# EAGLE board matrix_io_panel (EAGLE 9.5.2), part 1 of 3
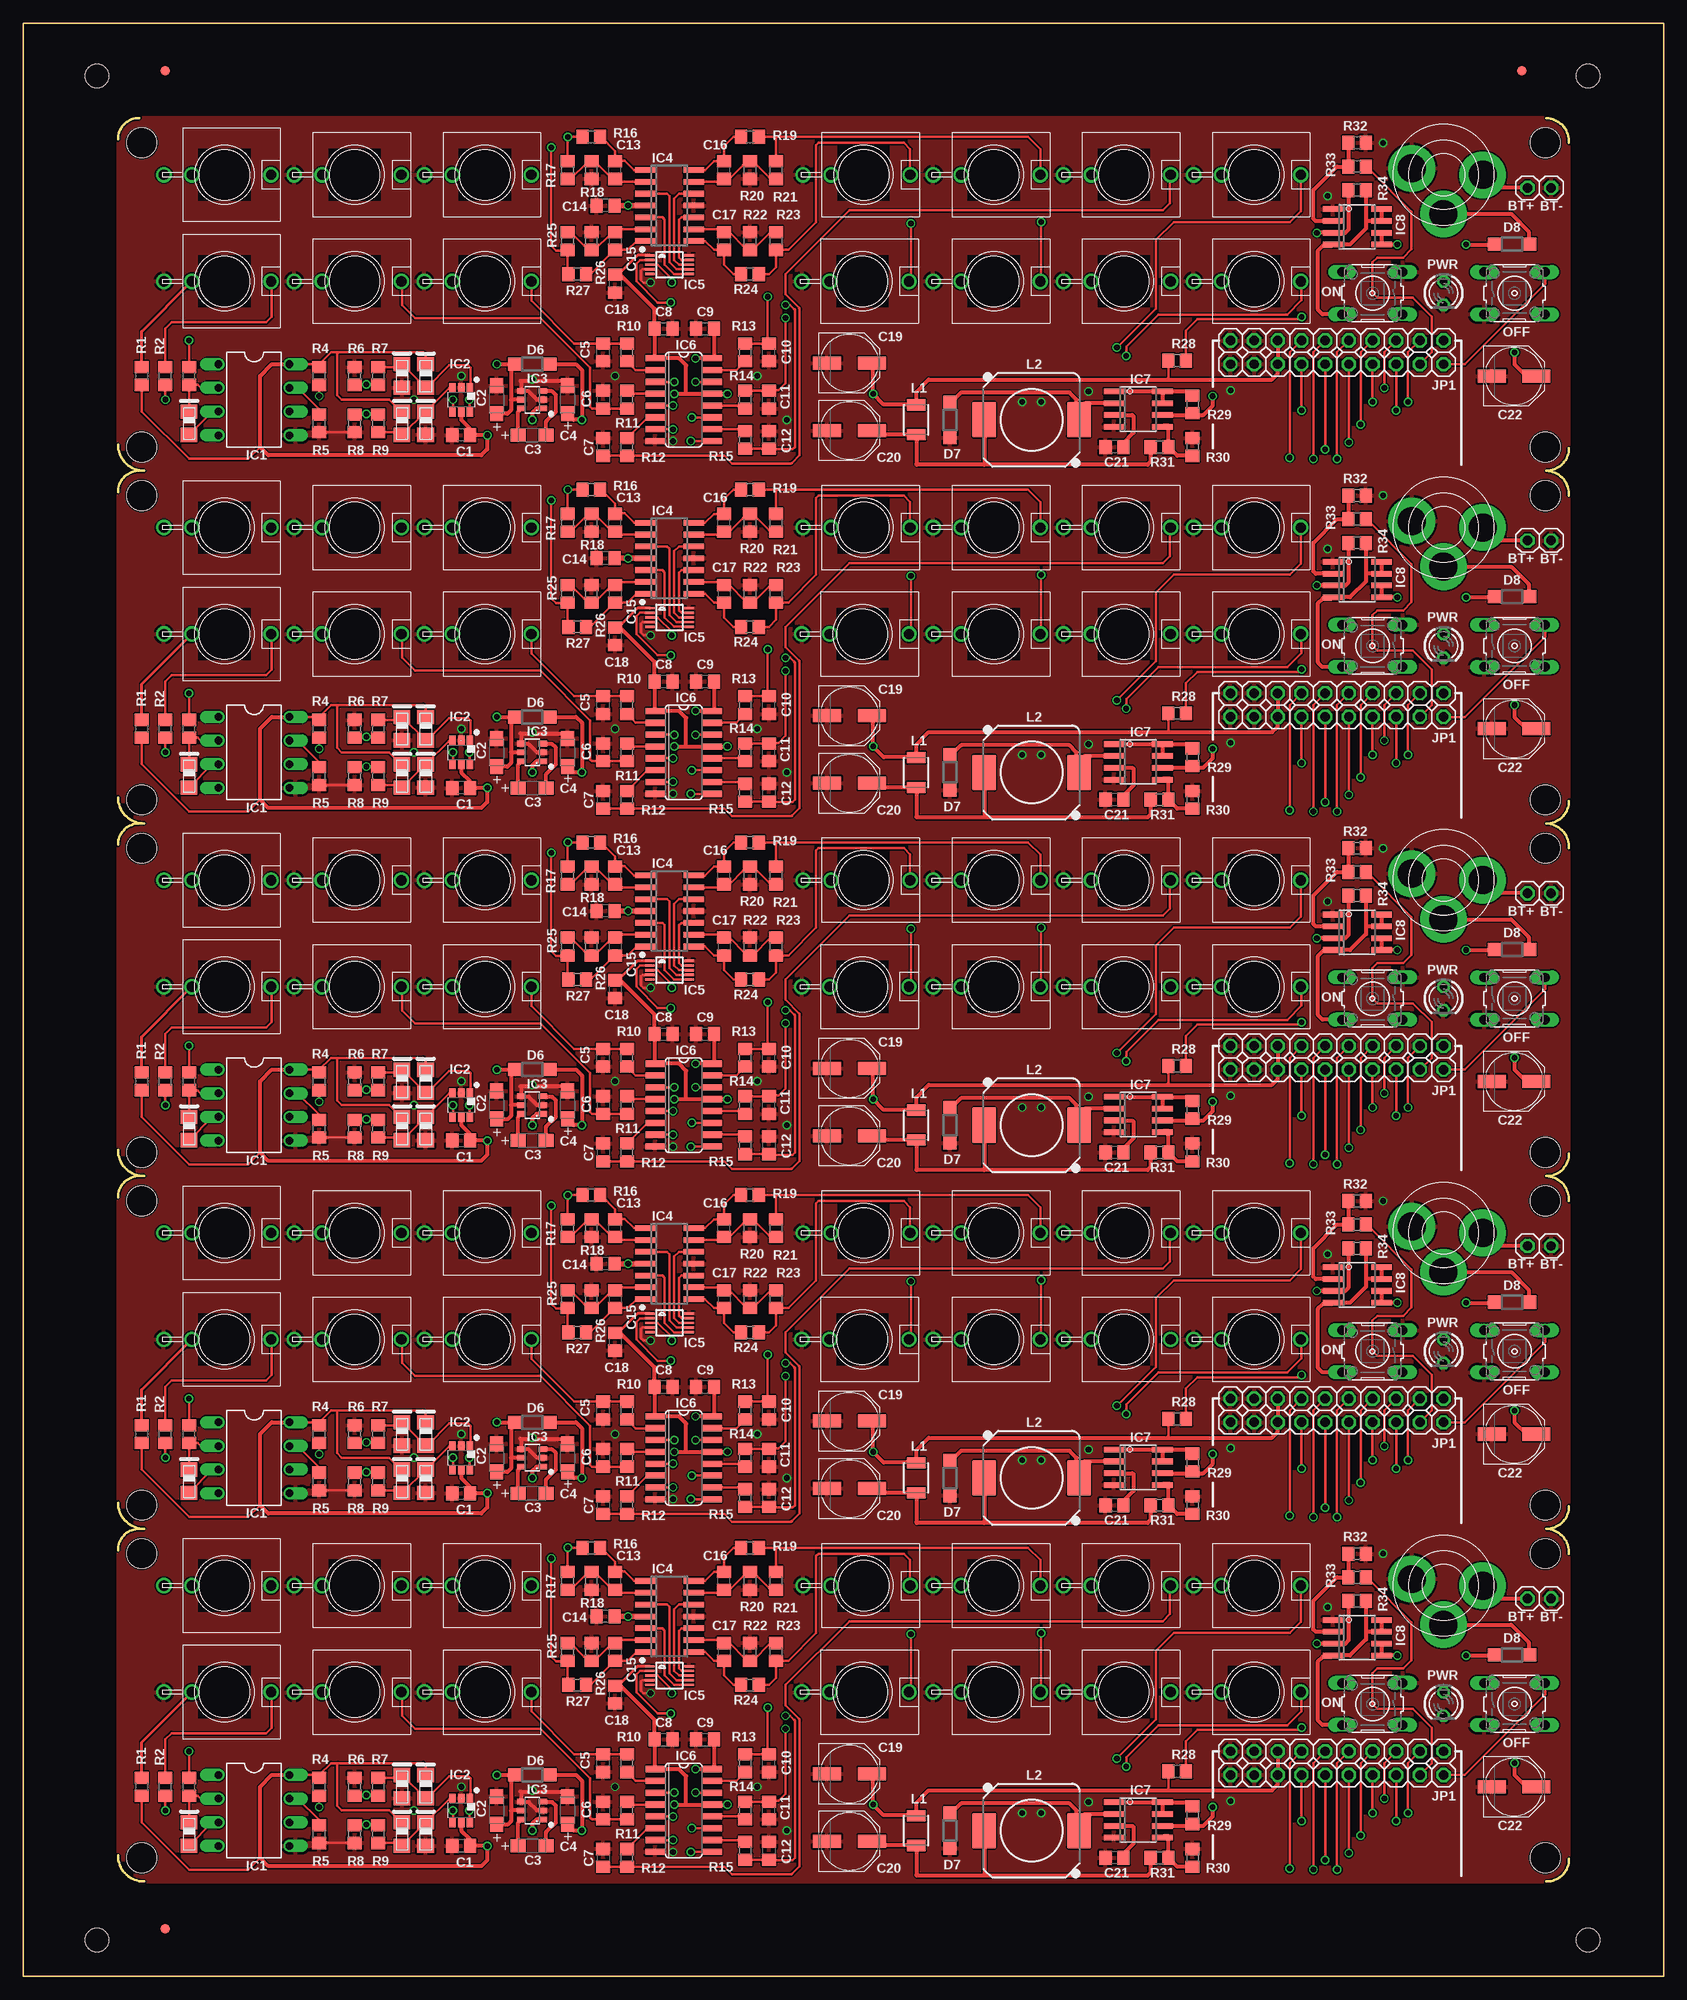
[diagram p0: board, top side]
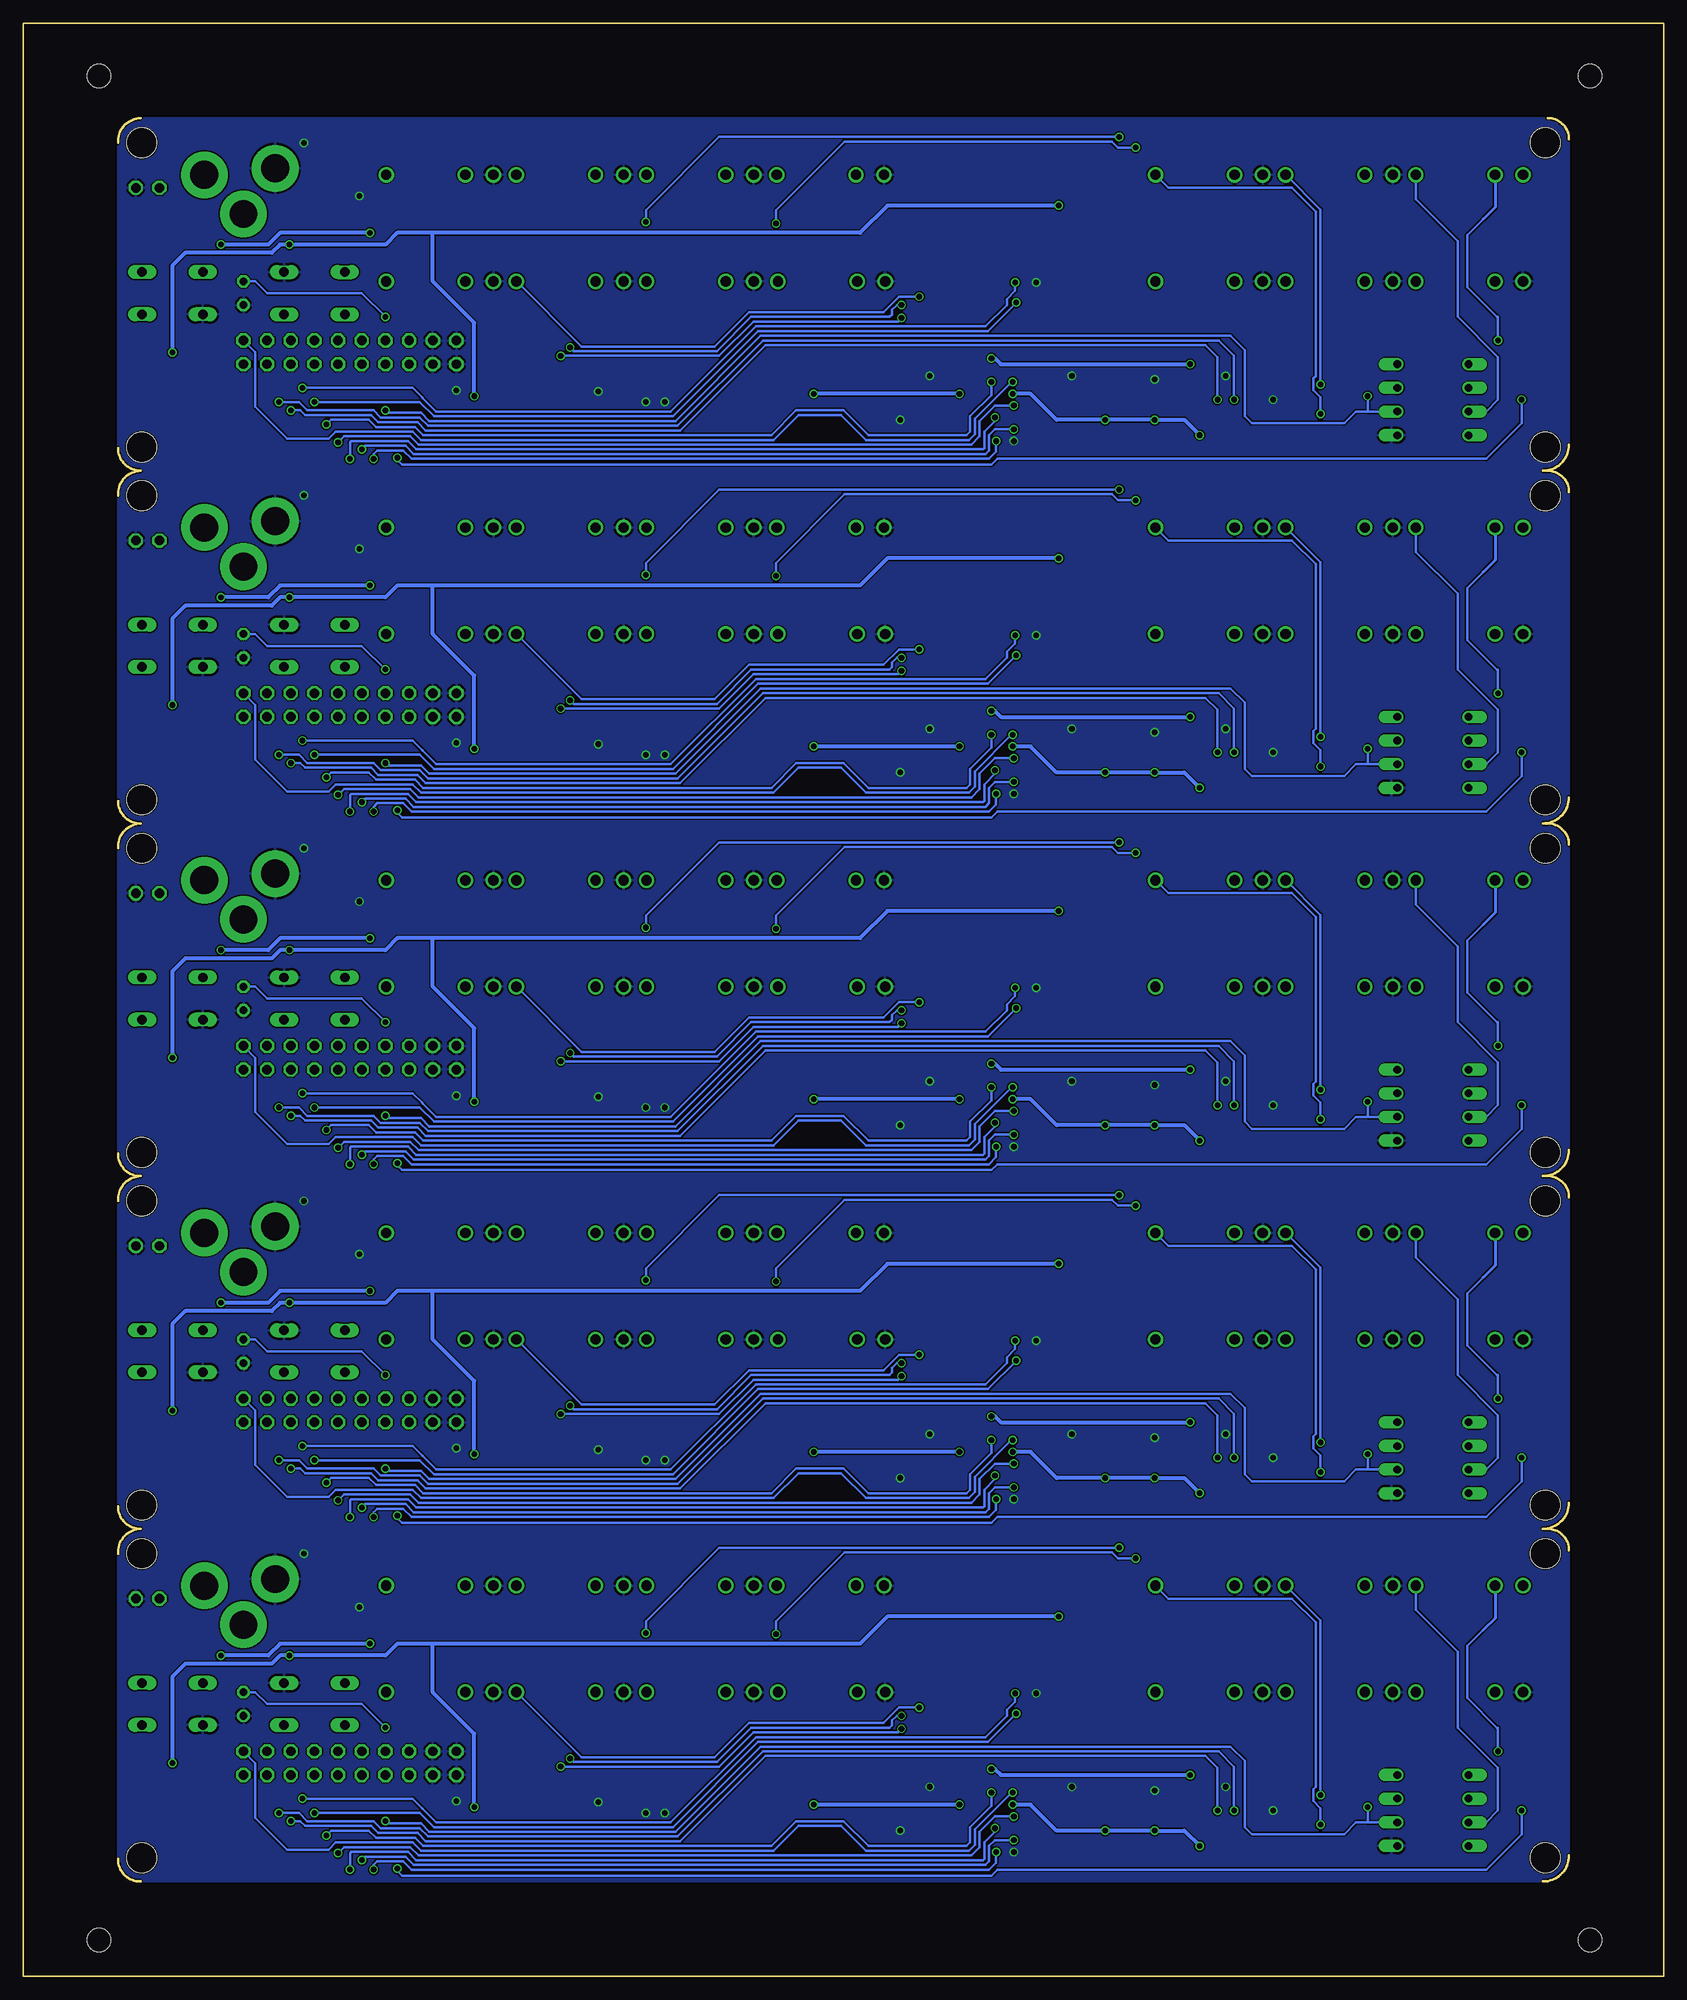
[diagram p1: board, bottom side, seen from below]

Size 176.02 x 209.55 mm. Coordinates in mm from the lower left corner, seen from the top.
Outline: 10.16,12.95 arc90 12.95,10.16
Outline: 163.45,10.16 arc90 165.86,12.57
Outline: 165.86,45.34 arc90 163.45,48.01 arc90 165.86,50.42
Outline: 10.16,45.72 arc-90 12.45,48.01 12.95,48.01 arc-90 10.16,50.8
Outline: 165.86,83.19 arc90 163.45,85.85 arc90 165.86,88.27
Outline: 10.16,83.57 arc-90 12.45,85.85 12.95,85.85 arc-90 10.16,88.65
Outline: 165.86,121.03 arc90 163.45,123.7 arc90 165.86,126.11
Outline: 10.16,121.41 arc-90 12.45,123.7 12.95,123.7 arc-90 10.16,126.49
Outline: 165.86,158.88 arc90 163.45,161.54 arc90 165.86,163.96
Outline: 10.16,159.26 arc-90 12.45,161.54 12.95,161.54 arc-90 10.16,164.34
Outline: 165.86,196.72 arc90 163.45,199.39
Outline: 10.16,197.1 arc-90 12.45,199.39
Outline: 0,0 176.02,0 176.02,209.55 0,209.55 0,0
Copper layers (1*16): Top 0.035mm / dielectric 1.5mm / Bottom 0.035mm
Design rules "hackvana": minimum track width 6mil, minimum drill 0.3mm, track to track 6mil, track to pad 9mil, pad to pad 6mil, via to via 6mil, smd to smd 0mil, copper to edge 6mil, drill to drill 6mil, minimum pad ring 10mil, minimum via ring 6mil, stop-mask expansion 2mil, vias tented up to drill 100mil, thermal gap 10mil
Holes 3.2 mm at 12.7,12.7 163.32,12.7 12.7,45.34 163.32,45.34 12.7,50.55 163.32,50.55 12.7,83.19 163.32,83.19 12.7,88.39 163.32,88.39 12.7,121.03 163.32,121.03 12.7,126.24 163.32,126.24 12.7,158.88 163.32,158.88 12.7,164.08 163.32,164.08 12.7,196.72 163.32,196.72
Holes 2.54 mm at 7.89,203.89 167.89,203.89 167.89,3.89 7.89,3.89

## Footprints (pad centres in the part's own frame; a part is rotated, then mirrored left to right if it is on the bottom)
1X01 = drill 1.016 octagon: 1 0,0
WQP-PJ301M-12_JACK = drill 1.1: P$1 0,5; P$2 0,-3.5; P$3 0,-6.5
C0805 = smd 1.3 x 1.5: 1 -0.95,0; 2 0.95,0
SMC_A = smd 1.6 x 1.4: + -1.5,0; - 1.5,0
PANASONIC_D = smd 3 x 1.4: + 2.4,0; - -2.4,0
0805DIODE = smd 1.524 x 1.778: A -1.262,-0.005; C 1.238,-0.005
SOD123 = smd 1.4 x 1.4: A 1.9,0; C -1.9,0
PWR_SOCKET_2_1MM = drill 3 pad 5: BARREL 0,4.2; NC -4.2,0; PIN 3.4,-0.7
FIDUCIAL_1MM = smd 1 x 1: 1 0,0
DIL08 = drill 0.813 offset: 1 -3.81,-3.81; 2 -1.27,-3.81; 3 1.27,-3.81; 4 3.81,-3.81; 5 3.81,3.81; 6 1.27,3.81; 7 -1.27,3.81; 8 -3.81,3.81
DBV_R-PDSO-G6 = smd 0.69 x 0.99: 1 -0.95,-1.29; 2 0,-1.29; 3 0.95,-1.29; 4 0.95,1.3; 5 0,1.3; 6 -0.95,1.3
SOT23-6 = smd 0.6 x 0.9: 1 -0.95,-1.15; 2 0,-1.15; 3 0.95,-1.15; 4 0.95,1.15; 5 0,1.15; 6 -0.95,1.15
SO14 = smd 0.6 x 2.2: 1 -3.81,-2.6; 2 -2.54,-2.6; 3 -1.27,-2.6; 4 0,-2.6; 5 1.27,-2.6; 6 2.54,-2.6; 7 3.81,-2.6; 8 3.81,2.6; 9 2.54,2.6; 10 1.27,2.6; 11 0,2.6; 12 -1.27,2.6; 13 -2.54,2.6; 14 -3.81,2.6
MSOP10 = smd 0.25 x 1: 1 -1,-2.113; 2 -0.5,-2.113; 3 0,-2.113; 4 0.5,-2.113; 5 1,-2.113; 6 1,2.113; 7 0.5,2.113; 8 0,2.113; 9 -0.5,2.113; 10 -1,2.113
SO16 = smd 0.66 x 2.032: 1 -4.445,-3.073; 2 -3.175,-3.073; 3 -1.905,-3.073; 4 -0.635,-3.073; 5 0.635,-3.073; 6 1.905,-3.073; 7 3.175,-3.073; 8 4.445,-3.073; 9 4.445,3.073; 10 3.175,3.073; 11 1.905,3.073; 12 0.635,3.073; 13 -0.635,3.073; 14 -1.905,3.073; 15 -3.175,3.073; 16 -4.445,3.073
SOIC8 = smd 0.6 x 2.2: 1 -1.905,-2.6; 2 -0.635,-2.6; 3 0.635,-2.6; 4 1.905,-2.6; 5 1.905,2.6; 6 0.635,2.6; 7 -0.635,2.6; 8 -1.905,2.6
1210 = smd 1.2 x 2: 1 -1.6,0; 2 1.6,0
DR1030 = smd 3.81 x 2.54: 1 0,5.085; 2 0,-5.085
WQP-PJ301M-ST = drill 1.1: P$1 0,5; P$2 0,-3.5; P$3 0,-6.5
B3F-10XX = drill 1.016 long: 1 -3.251,2.261; 2 3.251,2.261; 3 -3.251,-2.261; 4 3.251,-2.261
LED3MM = drill 0.813 octagon: A -1.27,0; K 1.27,0
R0805 = smd 1.3 x 1.5: 1 -0.95,0; 2 0.95,0

## Placement (x,y rotation side)
5V  [1X01]  134.62,24.13 0 top
5V1  [1X01]  134.62,61.98 0 top
5V2  [1X01]  134.62,99.82 0 top
5V3  [1X01]  134.62,137.67 0 top
5V4  [1X01]  134.62,175.51 0 top
5V.  [1X01]  134.62,21.59 0 top
5V.1  [1X01]  134.62,59.44 0 top
5V.2  [1X01]  134.62,97.28 0 top
5V.3  [1X01]  134.62,135.13 0 top
5V.4  [1X01]  134.62,172.97 0 top
AUXI  WQP-PJ301M-12_JACK  [WQP-PJ301M-12_JACK]  49.53,41.91 270 top
AUXI1  WQP-PJ301M-12_JACK  [WQP-PJ301M-12_JACK]  49.53,79.76 270 top
AUXI2  WQP-PJ301M-12_JACK  [WQP-PJ301M-12_JACK]  49.53,117.6 270 top
AUXI3  WQP-PJ301M-12_JACK  [WQP-PJ301M-12_JACK]  49.53,155.45 270 top
AUXI4  WQP-PJ301M-12_JACK  [WQP-PJ301M-12_JACK]  49.53,193.29 270 top
AUXO  WQP-PJ301M-12_JACK  [WQP-PJ301M-12_JACK]  49.53,30.48 270 top
AUXO1  WQP-PJ301M-12_JACK  [WQP-PJ301M-12_JACK]  49.53,68.33 270 top
AUXO2  WQP-PJ301M-12_JACK  [WQP-PJ301M-12_JACK]  49.53,106.17 270 top
AUXO3  WQP-PJ301M-12_JACK  [WQP-PJ301M-12_JACK]  49.53,144.02 270 top
AUXO4  WQP-PJ301M-12_JACK  [WQP-PJ301M-12_JACK]  49.53,181.86 270 top
BT+  [1X01]  161.42,40.51 0 top
BT+1  [1X01]  161.42,78.36 0 top
BT+2  [1X01]  161.42,116.2 0 top
BT+3  [1X01]  161.42,154.05 0 top
BT+4  [1X01]  161.42,191.9 0 top
BT-  [1X01]  163.96,40.51 0 top
BT-1  [1X01]  163.96,78.36 0 top
BT-2  [1X01]  163.96,116.2 0 top
BT-3  [1X01]  163.96,154.05 0 top
BT-4  [1X01]  163.96,191.9 0 top
C1  100n  [C0805]  46.99,13.97 180 top
C2  10u  [SMC_A]  50.8,17.78 90 top
C3  10u  [SMC_A]  54.61,13.97 0 top
C4  10u  [SMC_A]  58.42,17.78 90 top
C5  10n  [C0805]  62.23,22.86 90 top
C6  10n  [C0805]  62.23,17.78 270 top
C7  10n  [C0805]  62.23,12.7 270 top
C8  100n  [C0805]  68.71,25.4 0 top
C9  100n  [C0805]  73.15,25.4 0 top
C10  10n  [C0805]  80.01,22.86 90 top
C11  10n  [C0805]  80.01,17.78 90 top
C12  10n  [C0805]  80.01,13.46 270 top
C13  20p  [C0805]  63.5,42.42 90 top
C14  [C0805]  62.48,38.61 180 top
C15  [C0805]  63.5,34.8 270 top
C16  [C0805]  75.18,42.42 90 top
C17  [C0805]  75.18,34.8 270 top
C18  100n  [C0805]  63.5,30.23 270 top
C19  [PANASONIC_D]  88.65,21.72 0 top
C20  [PANASONIC_D]  88.65,14.48 0 top
C21  470p  [C0805]  117.09,12.7 180 top
C22  [PANASONIC_D]  159.96,20.32 0 top
C23  [C0805]  62.48,76.45 180 top
C24  100n  [C0805]  63.5,68.07 270 top
C25  [PANASONIC_D]  159.96,58.17 0 top
C26  470p  [C0805]  117.09,50.55 180 top
C27  [PANASONIC_D]  88.65,52.32 0 top
C28  10u  [SMC_A]  54.61,51.82 0 top
C29  10u  [SMC_A]  50.8,55.63 90 top
C30  10u  [SMC_A]  58.42,55.63 90 top
C31  100n  [C0805]  68.71,63.25 0 top
C32  100n  [C0805]  73.15,63.25 0 top
C33  [PANASONIC_D]  88.65,59.56 0 top
C34  100n  [C0805]  46.99,51.82 180 top
C35  20p  [C0805]  63.5,80.26 90 top
C36  [C0805]  63.5,72.64 270 top
C37  [C0805]  75.18,72.64 270 top
C38  [C0805]  75.18,80.26 90 top
C39  10n  [C0805]  62.23,60.71 90 top
C40  10n  [C0805]  62.23,55.63 270 top
C41  10n  [C0805]  62.23,50.55 270 top
C42  10n  [C0805]  80.01,55.63 90 top
C43  10n  [C0805]  80.01,60.71 90 top
C44  10n  [C0805]  80.01,51.31 270 top
C45  [C0805]  62.48,114.3 180 top
C46  100n  [C0805]  63.5,105.92 270 top
C47  [PANASONIC_D]  159.96,96.01 0 top
C48  470p  [C0805]  117.09,88.39 180 top
C49  [PANASONIC_D]  88.65,90.17 0 top
C50  10u  [SMC_A]  54.61,89.66 0 top
C51  10u  [SMC_A]  50.8,93.47 90 top
C52  10u  [SMC_A]  58.42,93.47 90 top
C53  100n  [C0805]  68.71,101.09 0 top
C54  100n  [C0805]  73.15,101.09 0 top
C55  [PANASONIC_D]  88.65,97.41 0 top
C56  100n  [C0805]  46.99,89.66 180 top
C57  20p  [C0805]  63.5,118.11 90 top
C58  [C0805]  63.5,110.49 270 top
C59  [C0805]  75.18,110.49 270 top
C60  [C0805]  75.18,118.11 90 top
C61  10n  [C0805]  62.23,98.55 90 top
C62  10n  [C0805]  62.23,93.47 270 top
C63  10n  [C0805]  62.23,88.39 270 top
C64  10n  [C0805]  80.01,93.47 90 top
C65  10n  [C0805]  80.01,98.55 90 top
C66  10n  [C0805]  80.01,89.15 270 top
C67  [C0805]  62.48,152.15 180 top
C68  100n  [C0805]  63.5,143.76 270 top
C69  [PANASONIC_D]  159.96,133.86 0 top
C70  470p  [C0805]  117.09,126.24 180 top
C71  [PANASONIC_D]  88.65,128.02 0 top
C72  10u  [SMC_A]  54.61,127.51 0 top
C73  10u  [SMC_A]  50.8,131.32 90 top
C74  10u  [SMC_A]  58.42,131.32 90 top
C75  100n  [C0805]  68.71,138.94 0 top
C76  100n  [C0805]  73.15,138.94 0 top
C77  [PANASONIC_D]  88.65,135.25 0 top
C78  100n  [C0805]  46.99,127.51 180 top
C79  20p  [C0805]  63.5,155.96 90 top
C80  [C0805]  63.5,148.34 270 top
C81  [C0805]  75.18,148.34 270 top
C82  [C0805]  75.18,155.96 90 top
C83  10n  [C0805]  62.23,136.4 90 top
C84  10n  [C0805]  62.23,131.32 270 top
C85  10n  [C0805]  62.23,126.24 270 top
C86  10n  [C0805]  80.01,131.32 90 top
C87  10n  [C0805]  80.01,136.4 90 top
C88  10n  [C0805]  80.01,127 270 top
C89  [C0805]  62.48,189.99 180 top
C90  100n  [C0805]  63.5,181.61 270 top
C91  [PANASONIC_D]  159.96,171.7 0 top
C92  470p  [C0805]  117.09,164.08 180 top
C93  [PANASONIC_D]  88.65,165.86 0 top
C94  10u  [SMC_A]  54.61,165.35 0 top
C95  10u  [SMC_A]  50.8,169.16 90 top
C96  10u  [SMC_A]  58.42,169.16 90 top
C97  100n  [C0805]  68.71,176.78 0 top
C98  100n  [C0805]  73.15,176.78 0 top
C99  [PANASONIC_D]  88.65,173.1 0 top
C100  100n  [C0805]  46.99,165.35 180 top
C101  20p  [C0805]  63.5,193.8 90 top
C102  [C0805]  63.5,186.18 270 top
C103  [C0805]  75.18,186.18 270 top
C104  [C0805]  75.18,193.8 90 top
C105  10n  [C0805]  62.23,174.24 90 top
C106  10n  [C0805]  62.23,169.16 270 top
C107  10n  [C0805]  62.23,164.08 270 top
C108  10n  [C0805]  80.01,169.16 90 top
C109  10n  [C0805]  80.01,174.24 90 top
C110  10n  [C0805]  80.01,164.85 270 top
CKI  WQP-PJ301M-12_JACK  [WQP-PJ301M-12_JACK]  35.56,41.91 270 top
CKI1  WQP-PJ301M-12_JACK  [WQP-PJ301M-12_JACK]  35.56,79.76 270 top
CKI2  WQP-PJ301M-12_JACK  [WQP-PJ301M-12_JACK]  35.56,117.6 270 top
CKI3  WQP-PJ301M-12_JACK  [WQP-PJ301M-12_JACK]  35.56,155.45 270 top
CKI4  WQP-PJ301M-12_JACK  [WQP-PJ301M-12_JACK]  35.56,193.29 270 top
CKO  WQP-PJ301M-12_JACK  [WQP-PJ301M-12_JACK]  35.56,30.48 270 top
CKO1  WQP-PJ301M-12_JACK  [WQP-PJ301M-12_JACK]  35.56,68.33 270 top
CKO2  WQP-PJ301M-12_JACK  [WQP-PJ301M-12_JACK]  35.56,106.17 270 top
CKO3  WQP-PJ301M-12_JACK  [WQP-PJ301M-12_JACK]  35.56,144.02 270 top
CKO4  WQP-PJ301M-12_JACK  [WQP-PJ301M-12_JACK]  35.56,181.86 270 top
CKOUT  [1X01]  152.4,24.13 90 top
CKOUT1  [1X01]  152.4,61.98 90 top
CKOUT2  [1X01]  152.4,99.82 90 top
CKOUT3  [1X01]  152.4,137.67 90 top
CKOUT4  [1X01]  152.4,175.51 90 top
CLKIN  [1X01]  147.32,21.59 90 top
CLKIN1  [1X01]  147.32,59.44 90 top
CLKIN2  [1X01]  147.32,97.28 90 top
CLKIN3  [1X01]  147.32,135.13 90 top
CLKIN4  [1X01]  147.32,172.97 90 top
CVA  WQP-PJ301M-12_JACK  [WQP-PJ301M-12_JACK]  90.17,41.91 270 top
CVA1  WQP-PJ301M-12_JACK  [WQP-PJ301M-12_JACK]  90.17,79.76 270 top
CVA2  WQP-PJ301M-12_JACK  [WQP-PJ301M-12_JACK]  90.17,117.6 270 top
CVA3  WQP-PJ301M-12_JACK  [WQP-PJ301M-12_JACK]  90.17,155.45 270 top
CVA4  WQP-PJ301M-12_JACK  [WQP-PJ301M-12_JACK]  90.17,193.29 270 top
CVB  WQP-PJ301M-12_JACK  [WQP-PJ301M-12_JACK]  104.14,41.91 270 top
CVB1  WQP-PJ301M-12_JACK  [WQP-PJ301M-12_JACK]  104.14,79.76 270 top
CVB2  WQP-PJ301M-12_JACK  [WQP-PJ301M-12_JACK]  104.14,117.6 270 top
CVB3  WQP-PJ301M-12_JACK  [WQP-PJ301M-12_JACK]  104.14,155.45 270 top
CVB4  WQP-PJ301M-12_JACK  [WQP-PJ301M-12_JACK]  104.14,193.29 270 top
CVC  WQP-PJ301M-12_JACK  [WQP-PJ301M-12_JACK]  104.14,30.48 270 top
CVC1  WQP-PJ301M-12_JACK  [WQP-PJ301M-12_JACK]  104.14,68.33 270 top
CVC2  WQP-PJ301M-12_JACK  [WQP-PJ301M-12_JACK]  104.14,106.17 270 top
CVC3  WQP-PJ301M-12_JACK  [WQP-PJ301M-12_JACK]  104.14,144.02 270 top
CVC4  WQP-PJ301M-12_JACK  [WQP-PJ301M-12_JACK]  104.14,181.86 270 top
CVD  WQP-PJ301M-12_JACK  [WQP-PJ301M-12_JACK]  90.04,30.48 270 top
CVD1  WQP-PJ301M-12_JACK  [WQP-PJ301M-12_JACK]  90.04,68.33 270 top
CVD2  WQP-PJ301M-12_JACK  [WQP-PJ301M-12_JACK]  90.04,106.17 270 top
CVD3  WQP-PJ301M-12_JACK  [WQP-PJ301M-12_JACK]  90.04,144.02 270 top
CVD4  WQP-PJ301M-12_JACK  [WQP-PJ301M-12_JACK]  90.04,181.86 270 top
D1  0805DIODE  [0805DIODE]  17.78,15.24 270 top
D2  0805DIODE  [0805DIODE]  40.64,20.32 270 top
D3  0805DIODE  [0805DIODE]  43.18,20.32 270 top
D4  0805DIODE  [0805DIODE]  40.64,15.24 270 top
D5  0805DIODE  [0805DIODE]  43.18,15.24 270 top
D6  MBR0520LT  [SOD123]  54.61,21.59 0 top
D7  MBR0520LT  [SOD123]  99.44,15.62 270 top
D8  MBR0520LT  [SOD123]  159.77,34.48 0 top
D9  0805DIODE  [0805DIODE]  17.78,53.09 270 top
D10  MBR0520LT  [SOD123]  54.61,59.44 0 top
D11  0805DIODE  [0805DIODE]  43.18,58.17 270 top
D12  0805DIODE  [0805DIODE]  40.64,58.17 270 top
D13  MBR0520LT  [SOD123]  159.77,72.33 0 top
D14  0805DIODE  [0805DIODE]  40.64,53.09 270 top
D15  0805DIODE  [0805DIODE]  43.18,53.09 270 top
D16  MBR0520LT  [SOD123]  99.44,53.47 270 top
D17  0805DIODE  [0805DIODE]  17.78,90.93 270 top
D18  MBR0520LT  [SOD123]  54.61,97.28 0 top
D19  0805DIODE  [0805DIODE]  43.18,96.01 270 top
D20  0805DIODE  [0805DIODE]  40.64,96.01 270 top
D21  MBR0520LT  [SOD123]  159.77,110.17 0 top
D22  0805DIODE  [0805DIODE]  40.64,90.93 270 top
D23  0805DIODE  [0805DIODE]  43.18,90.93 270 top
D24  MBR0520LT  [SOD123]  99.44,91.31 270 top
D25  0805DIODE  [0805DIODE]  17.78,128.78 270 top
D26  MBR0520LT  [SOD123]  54.61,135.13 0 top
D27  0805DIODE  [0805DIODE]  43.18,133.86 270 top
D28  0805DIODE  [0805DIODE]  40.64,133.86 270 top
D29  MBR0520LT  [SOD123]  159.77,148.02 0 top
D30  0805DIODE  [0805DIODE]  40.64,128.78 270 top
D31  0805DIODE  [0805DIODE]  43.18,128.78 270 top
D32  MBR0520LT  [SOD123]  99.44,129.16 270 top
D33  0805DIODE  [0805DIODE]  17.78,166.62 270 top
D34  MBR0520LT  [SOD123]  54.61,172.97 0 top
D35  0805DIODE  [0805DIODE]  43.18,171.7 270 top
D36  0805DIODE  [0805DIODE]  40.64,171.7 270 top
D37  MBR0520LT  [SOD123]  159.77,185.86 0 top
D38  0805DIODE  [0805DIODE]  40.64,166.62 270 top
D39  0805DIODE  [0805DIODE]  43.18,166.62 270 top
D40  MBR0520LT  [SOD123]  99.44,167 270 top
DC  PWR_SOCKET_2_1MM  [PWR_SOCKET_2_1MM]  152.4,41.91 180 top
DC1  PWR_SOCKET_2_1MM  [PWR_SOCKET_2_1MM]  152.4,79.76 180 top
DC2  PWR_SOCKET_2_1MM  [PWR_SOCKET_2_1MM]  152.4,117.6 180 top
DC3  PWR_SOCKET_2_1MM  [PWR_SOCKET_2_1MM]  152.4,155.45 180 top
DC4  PWR_SOCKET_2_1MM  [PWR_SOCKET_2_1MM]  152.4,193.29 180 top
E$1  [FIDUCIAL_1MM]  15.24,204.47 0 top
E$2  [FIDUCIAL_1MM]  160.78,204.47 0 top
E$3  [FIDUCIAL_1MM]  15.24,5.08 0 top
G1  [1X01]  139.7,21.59 90 top
G2  [1X01]  142.24,21.59 90 top
G3  [1X01]  144.78,24.13 90 top
G4  [1X01]  142.24,24.13 90 top
G5  [1X01]  144.78,61.98 90 top
G6  [1X01]  142.24,59.44 90 top
G7  [1X01]  139.7,59.44 90 top
G8  [1X01]  142.24,61.98 90 top
G9  [1X01]  144.78,99.82 90 top
G10  [1X01]  142.24,97.28 90 top
G11  [1X01]  139.7,97.28 90 top
G12  [1X01]  142.24,99.82 90 top
G13  [1X01]  144.78,137.67 90 top
G14  [1X01]  142.24,135.13 90 top
G15  [1X01]  139.7,135.13 90 top
G16  [1X01]  142.24,137.67 90 top
G17  [1X01]  144.78,175.51 90 top
G18  [1X01]  142.24,172.97 90 top
G19  [1X01]  139.7,172.97 90 top
G20  [1X01]  142.24,175.51 90 top
GD1  [1X01]  132.08,24.13 90 top
GD2  [1X01]  132.08,21.59 0 top
GD3  [1X01]  129.54,21.59 0 top
GD4  [1X01]  129.54,24.13 0 top
GD5  [1X01]  132.08,59.44 0 top
GD6  [1X01]  132.08,61.98 90 top
GD7  [1X01]  129.54,59.44 0 top
GD8  [1X01]  129.54,61.98 0 top
GD9  [1X01]  132.08,97.28 0 top
GD10  [1X01]  132.08,99.82 90 top
GD11  [1X01]  129.54,97.28 0 top
GD12  [1X01]  129.54,99.82 0 top
GD13  [1X01]  132.08,135.13 0 top
GD14  [1X01]  132.08,137.67 90 top
GD15  [1X01]  129.54,135.13 0 top
GD16  [1X01]  129.54,137.67 0 top
GD17  [1X01]  132.08,172.97 0 top
GD18  [1X01]  132.08,175.51 90 top
GD19  [1X01]  129.54,172.97 0 top
GD20  [1X01]  129.54,175.51 0 top
GT1  WQP-PJ301M-12_JACK  [WQP-PJ301M-12_JACK]  118.11,41.91 270 top
GT2  WQP-PJ301M-12_JACK  [WQP-PJ301M-12_JACK]  132.08,41.91 270 top
GT3  WQP-PJ301M-12_JACK  [WQP-PJ301M-12_JACK]  118.11,30.48 270 top
GT4  WQP-PJ301M-12_JACK  [WQP-PJ301M-12_JACK]  132.08,30.48 270 top
GT5  WQP-PJ301M-12_JACK  [WQP-PJ301M-12_JACK]  132.08,79.76 270 top
GT6  WQP-PJ301M-12_JACK  [WQP-PJ301M-12_JACK]  118.11,79.76 270 top
GT7  WQP-PJ301M-12_JACK  [WQP-PJ301M-12_JACK]  132.08,68.33 270 top
GT8  WQP-PJ301M-12_JACK  [WQP-PJ301M-12_JACK]  118.11,68.33 270 top
GT9  WQP-PJ301M-12_JACK  [WQP-PJ301M-12_JACK]  132.08,117.6 270 top
GT10  WQP-PJ301M-12_JACK  [WQP-PJ301M-12_JACK]  118.11,117.6 270 top
GT11  WQP-PJ301M-12_JACK  [WQP-PJ301M-12_JACK]  132.08,106.17 270 top
GT12  WQP-PJ301M-12_JACK  [WQP-PJ301M-12_JACK]  118.11,106.17 270 top
GT13  WQP-PJ301M-12_JACK  [WQP-PJ301M-12_JACK]  132.08,155.45 270 top
GT14  WQP-PJ301M-12_JACK  [WQP-PJ301M-12_JACK]  118.11,155.45 270 top
GT15  WQP-PJ301M-12_JACK  [WQP-PJ301M-12_JACK]  132.08,144.02 270 top
GT16  WQP-PJ301M-12_JACK  [WQP-PJ301M-12_JACK]  118.11,144.02 270 top
GT17  WQP-PJ301M-12_JACK  [WQP-PJ301M-12_JACK]  132.08,193.29 270 top
GT18  WQP-PJ301M-12_JACK  [WQP-PJ301M-12_JACK]  118.11,193.29 270 top
GT19  WQP-PJ301M-12_JACK  [WQP-PJ301M-12_JACK]  132.08,181.86 270 top
GT20  WQP-PJ301M-12_JACK  [WQP-PJ301M-12_JACK]  118.11,181.86 270 top
IC1  6N138  [DIL08]  24.77,17.78 270 top
IC2  SN74LVC2G14  [DBV_R-PDSO-G6]  46.99,17.78 180 top
IC3  LM27675M5_CHARGEPUMP  [SOT23-6]  54.61,17.78 90 top
IC4  LM324D  [SO14]  69.34,38.61 270 top
IC5  MCP4728_QUAD_DAC  [MSOP10]  69.34,32.26 270 top
IC6  4504D  [SO16]  70.87,17.78 270 top
IC7  SP34063A_BOOST_REG  [SOIC8]  119.63,16.76 270 top
IC8  FDS8958B  [SOIC8]  143.13,36.32 270 top
IC9  LM324D  [SO14]  69.34,76.45 270 top
IC10  6N138  [DIL08]  24.77,55.63 270 top
IC11  MCP4728_QUAD_DAC  [MSOP10]  69.34,70.1 270 top
IC12  SP34063A_BOOST_REG  [SOIC8]  119.63,54.61 270 top
IC13  LM27675M5_CHARGEPUMP  [SOT23-6]  54.61,55.63 90 top
IC14  4504D  [SO16]  70.87,55.63 270 top
IC15  FDS8958B  [SOIC8]  143.13,74.17 270 top
IC16  SN74LVC2G14  [DBV_R-PDSO-G6]  46.99,55.63 180 top
IC17  LM324D  [SO14]  69.34,114.3 270 top
IC18  6N138  [DIL08]  24.77,93.47 270 top
IC19  MCP4728_QUAD_DAC  [MSOP10]  69.34,107.95 270 top
IC20  SP34063A_BOOST_REG  [SOIC8]  119.63,92.46 270 top
IC21  LM27675M5_CHARGEPUMP  [SOT23-6]  54.61,93.47 90 top
IC22  4504D  [SO16]  70.87,93.47 270 top
IC23  FDS8958B  [SOIC8]  143.13,112.01 270 top
IC24  SN74LVC2G14  [DBV_R-PDSO-G6]  46.99,93.47 180 top
IC25  LM324D  [SO14]  69.34,152.15 270 top
IC26  6N138  [DIL08]  24.77,131.32 270 top
IC27  MCP4728_QUAD_DAC  [MSOP10]  69.34,145.8 270 top
IC28  SP34063A_BOOST_REG  [SOIC8]  119.63,130.3 270 top
IC29  LM27675M5_CHARGEPUMP  [SOT23-6]  54.61,131.32 90 top
IC30  4504D  [SO16]  70.87,131.32 270 top
IC31  FDS8958B  [SOIC8]  143.13,149.86 270 top
IC32  SN74LVC2G14  [DBV_R-PDSO-G6]  46.99,131.32 180 top
IC33  LM324D  [SO14]  69.34,189.99 270 top
IC34  6N138  [DIL08]  24.77,169.16 270 top
IC35  MCP4728_QUAD_DAC  [MSOP10]  69.34,183.64 270 top
IC36  SP34063A_BOOST_REG  [SOIC8]  119.63,168.15 270 top
IC37  LM27675M5_CHARGEPUMP  [SOT23-6]  54.61,169.16 90 top
IC38  4504D  [SO16]  70.87,169.16 270 top
IC39  FDS8958B  [SOIC8]  143.13,187.71 270 top
IC40  SN74LVC2G14  [DBV_R-PDSO-G6]  46.99,169.16 180 top
L1  [1210]  95.82,15.62 90 top
L2  [DR1030]  108.2,15.62 90 top
L3  [1210]  95.82,53.47 90 top
L4  [DR1030]  108.2,53.47 90 top
L5  [1210]  95.82,91.31 90 top
L6  [DR1030]  108.2,91.31 90 top
L7  [1210]  95.82,129.16 90 top
L8  [DR1030]  108.2,129.16 90 top
L9  [1210]  95.82,167 90 top
L10  [DR1030]  108.2,167 90 top
MIDIIN  THONKICONN_STEREO  [WQP-PJ301M-ST]  21.59,41.91 270 top
MIDIIN1  THONKICONN_STEREO  [WQP-PJ301M-ST]  21.59,79.76 270 top
MIDIIN2  THONKICONN_STEREO  [WQP-PJ301M-ST]  21.59,117.6 270 top
MIDIIN3  THONKICONN_STEREO  [WQP-PJ301M-ST]  21.59,155.45 270 top
MIDIIN4  THONKICONN_STEREO  [WQP-PJ301M-ST]  21.59,193.29 270 top
MIDIOUT  THONKICONN_STEREO  [WQP-PJ301M-ST]  21.59,30.48 270 top
MIDIOUT1  THONKICONN_STEREO  [WQP-PJ301M-ST]  21.59,68.33 270 top
MIDIOUT2  THONKICONN_STEREO  [WQP-PJ301M-ST]  21.59,106.17 270 top
MIDIOUT3  THONKICONN_STEREO  [WQP-PJ301M-ST]  21.59,144.02 270 top
MIDIOUT4  THONKICONN_STEREO  [WQP-PJ301M-ST]  21.59,181.86 270 top
OFF  [B3F-10XX]  160.02,29.21 0 top
OFF1  [B3F-10XX]  160.02,67.06 0 top
OFF2  [B3F-10XX]  160.02,104.9 0 top
OFF3  [B3F-10XX]  160.02,142.75 0 top
OFF4  [B3F-10XX]  160.02,180.59 0 top
OFFSW  [1X01]  152.4,21.59 0 top
OFFSW1  [1X01]  152.4,59.44 0 top
OFFSW2  [1X01]  152.4,97.28 0 top
OFFSW3  [1X01]  152.4,135.13 0 top
OFFSW4  [1X01]  152.4,172.97 0 top
ON  [B3F-10XX]  144.78,29.21 180 top
ON1  [B3F-10XX]  144.78,67.06 180 top
ON2  [B3F-10XX]  144.78,104.9 180 top
ON3  [B3F-10XX]  144.78,142.75 180 top
ON4  [B3F-10XX]  144.78,180.59 180 top
PWR  [LED3MM]  152.4,29.21 270 top
PWR1  [LED3MM]  152.4,67.06 270 top
PWR2  [LED3MM]  152.4,104.9 270 top
PWR3  [LED3MM]  152.4,142.75 270 top
PWR4  [LED3MM]  152.4,180.59 270 top
PWRCTL  [1X01]  149.86,21.59 90 top
PWRCTL1  [1X01]  149.86,59.44 90 top
PWRCTL2  [1X01]  149.86,97.28 90 top
PWRCTL3  [1X01]  149.86,135.13 90 top
PWRCTL4  [1X01]  149.86,172.97 90 top
R1  220  [R0805]  12.7,20.32 270 top
R2  220  [R0805]  15.24,20.32 270 top
R3  220  [R0805]  17.78,20.32 270 top
R4  1k8  [R0805]  31.75,20.32 90 top
R5  1k8  [R0805]  31.75,15.24 270 top
R6  100k  [R0805]  35.56,20.32 270 top
R7  1k  [R0805]  38.1,20.32 270 top
R8  100k  [R0805]  35.56,15.24 90 top
R9  1k  [R0805]  38.1,15.24 90 top
R10  1k  [R0805]  64.77,22.86 90 top
R11  1k  [R0805]  64.77,17.78 270 top
R12  1k  [R0805]  64.77,12.7 270 top
R13  1k  [R0805]  77.47,22.86 90 top
R14  1k  [R0805]  77.47,17.78 90 top
R15  1k  [R0805]  77.47,13.46 270 top
R16  1k  [R0805]  60.96,45.97 180 top
R17  10k/0.1%  [R0805]  58.42,42.42 90 top
R18  10k/0.1%  [R0805]  60.96,42.42 90 top
R19  1k  [R0805]  77.98,45.97 0 top
R20  10k/0.1%  [R0805]  77.98,42.42 90 top
R21  10k/0.1%  [R0805]  80.77,42.42 90 top
R22  10k/0.1%  [R0805]  77.98,34.8 270 top
R23  10k/0.1%  [R0805]  80.77,34.8 270 top
R24  1k  [R0805]  77.98,31.24 0 top
R25  10k/0.1%  [R0805]  58.42,34.8 270 top
R26  10k/0.1%  [R0805]  60.96,34.8 270 top
R27  1k  [R0805]  59.44,31.24 180 top
R28  1k  [R0805]  123.83,21.97 0 top
R29  0r33  [R0805]  125.48,17.27 90 top
R30  1k  [R0805]  125.48,12.7 270 top
R31  3k  [R0805]  121.92,12.7 0 top
R32  10k  [R0805]  143.13,45.34 180 top
R33  1k  [R0805]  143.13,42.8 180 top
R34  10k  [R0805]  143.13,40.26 0 top
R35  220  [R0805]  17.78,58.17 270 top
R36  1k8  [R0805]  31.75,53.09 270 top
R37  1k8  [R0805]  31.75,58.17 90 top
R38  220  [R0805]  12.7,58.17 270 top
R39  220  [R0805]  15.24,58.17 270 top
R40  1k  [R0805]  60.96,83.82 180 top
R41  1k  [R0805]  59.44,69.09 180 top
R42  1k  [R0805]  77.98,69.09 0 top
R43  1k  [R0805]  77.98,83.82 0 top
R44  10k/0.1%  [R0805]  58.42,80.26 90 top
R45  10k/0.1%  [R0805]  58.42,72.64 270 top
R46  10k/0.1%  [R0805]  80.77,72.64 270 top
R47  10k/0.1%  [R0805]  80.77,80.26 90 top
R48  10k/0.1%  [R0805]  60.96,80.26 90 top
R49  10k/0.1%  [R0805]  60.96,72.64 270 top
R50  10k/0.1%  [R0805]  77.98,72.64 270 top
R51  10k/0.1%  [R0805]  77.98,80.26 90 top
R52  0r33  [R0805]  125.48,55.12 90 top
R53  1k  [R0805]  125.48,50.55 270 top
R54  3k  [R0805]  121.92,50.55 0 top
R55  1k  [R0805]  64.77,60.71 90 top
R56  1k  [R0805]  64.77,55.63 270 top
R57  1k  [R0805]  64.77,50.55 270 top
R58  1k  [R0805]  77.47,55.63 90 top
R59  1k  [R0805]  77.47,60.71 90 top
R60  1k  [R0805]  38.1,58.17 270 top
R61  1k  [R0805]  123.83,59.82 0 top
R62  10k  [R0805]  143.13,78.11 0 top
R63  1k  [R0805]  143.13,80.64 180 top
R64  10k  [R0805]  143.13,83.19 180 top
R65  100k  [R0805]  35.56,58.17 270 top
R66  1k  [R0805]  77.47,51.31 270 top
R67  1k  [R0805]  38.1,53.09 90 top
R68  100k  [R0805]  35.56,53.09 90 top
R69  220  [R0805]  17.78,96.01 270 top
R70  1k8  [R0805]  31.75,90.93 270 top
R71  1k8  [R0805]  31.75,96.01 90 top
R72  220  [R0805]  12.7,96.01 270 top
R73  220  [R0805]  15.24,96.01 270 top
R74  1k  [R0805]  60.96,121.67 180 top
R75  1k  [R0805]  59.44,106.93 180 top
R76  1k  [R0805]  77.98,106.93 0 top
R77  1k  [R0805]  77.98,121.67 0 top
R78  10k/0.1%  [R0805]  58.42,118.11 90 top
R79  10k/0.1%  [R0805]  58.42,110.49 270 top
R80  10k/0.1%  [R0805]  80.77,110.49 270 top
R81  10k/0.1%  [R0805]  80.77,118.11 90 top
R82  10k/0.1%  [R0805]  60.96,118.11 90 top
R83  10k/0.1%  [R0805]  60.96,110.49 270 top
R84  10k/0.1%  [R0805]  77.98,110.49 270 top
R85  10k/0.1%  [R0805]  77.98,118.11 90 top
R86  0r33  [R0805]  125.48,92.96 90 top
R87  1k  [R0805]  125.48,88.39 270 top
R88  3k  [R0805]  121.92,88.39 0 top
R89  1k  [R0805]  64.77,98.55 90 top
R90  1k  [R0805]  64.77,93.47 270 top
R91  1k  [R0805]  64.77,88.39 270 top
R92  1k  [R0805]  77.47,93.47 90 top
R93  1k  [R0805]  77.47,98.55 90 top
R94  1k  [R0805]  38.1,96.01 270 top
R95  1k  [R0805]  123.83,97.66 0 top
R96  10k  [R0805]  143.13,115.95 0 top
R97  1k  [R0805]  143.13,118.49 180 top
R98  10k  [R0805]  143.13,121.03 180 top
R99  100k  [R0805]  35.56,96.01 270 top
R100  1k  [R0805]  77.47,89.15 270 top
R101  1k  [R0805]  38.1,90.93 90 top
R102  100k  [R0805]  35.56,90.93 90 top
R103  220  [R0805]  17.78,133.86 270 top
R104  1k8  [R0805]  31.75,128.78 270 top
R105  1k8  [R0805]  31.75,133.86 90 top
R106  220  [R0805]  12.7,133.86 270 top
R107  220  [R0805]  15.24,133.86 270 top
R108  1k  [R0805]  60.96,159.51 180 top
R109  1k  [R0805]  59.44,144.78 180 top
R110  1k  [R0805]  77.98,144.78 0 top
R111  1k  [R0805]  77.98,159.51 0 top
R112  10k/0.1%  [R0805]  58.42,155.96 90 top
R113  10k/0.1%  [R0805]  58.42,148.34 270 top
R114  10k/0.1%  [R0805]  80.77,148.34 270 top
R115  10k/0.1%  [R0805]  80.77,155.96 90 top
R116  10k/0.1%  [R0805]  60.96,155.96 90 top
R117  10k/0.1%  [R0805]  60.96,148.34 270 top
R118  10k/0.1%  [R0805]  77.98,148.34 270 top
R119  10k/0.1%  [R0805]  77.98,155.96 90 top
R120  0r33  [R0805]  125.48,130.81 90 top
R121  1k  [R0805]  125.48,126.24 270 top
R122  3k  [R0805]  121.92,126.24 0 top
R123  1k  [R0805]  64.77,136.4 90 top
R124  1k  [R0805]  64.77,131.32 270 top
R125  1k  [R0805]  64.77,126.24 270 top
R126  1k  [R0805]  77.47,131.32 90 top
R127  1k  [R0805]  77.47,136.4 90 top
R128  1k  [R0805]  38.1,133.86 270 top
R129  1k  [R0805]  123.83,135.51 0 top
R130  10k  [R0805]  143.13,153.8 0 top
R131  1k  [R0805]  143.13,156.34 180 top
R132  10k  [R0805]  143.13,158.88 180 top
R133  100k  [R0805]  35.56,133.86 270 top
R134  1k  [R0805]  77.47,127 270 top
R135  1k  [R0805]  38.1,128.78 90 top
R136  100k  [R0805]  35.56,128.78 90 top
R137  220  [R0805]  17.78,171.7 270 top
R138  1k8  [R0805]  31.75,166.62 270 top
R139  1k8  [R0805]  31.75,171.7 90 top
R140  220  [R0805]  12.7,171.7 270 top
R141  220  [R0805]  15.24,171.7 270 top
R142  1k  [R0805]  60.96,197.36 180 top
R143  1k  [R0805]  59.44,182.63 180 top
R144  1k  [R0805]  77.98,182.63 0 top
R145  1k  [R0805]  77.98,197.36 0 top
R146  10k/0.1%  [R0805]  58.42,193.8 90 top
R147  10k/0.1%  [R0805]  58.42,186.18 270 top
R148  10k/0.1%  [R0805]  80.77,186.18 270 top
R149  10k/0.1%  [R0805]  80.77,193.8 90 top
R150  10k/0.1%  [R0805]  60.96,193.8 90 top
R151  10k/0.1%  [R0805]  60.96,186.18 270 top
R152  10k/0.1%  [R0805]  77.98,186.18 270 top
R153  10k/0.1%  [R0805]  77.98,193.8 90 top
R154  0r33  [R0805]  125.48,168.66 90 top
R155  1k  [R0805]  125.48,164.08 270 top
R156  3k  [R0805]  121.92,164.08 0 top
R157  1k  [R0805]  64.77,174.24 90 top
R158  1k  [R0805]  64.77,169.16 270 top
R159  1k  [R0805]  64.77,164.08 270 top
R160  1k  [R0805]  77.47,169.16 90 top
R161  1k  [R0805]  77.47,174.24 90 top
R162  1k  [R0805]  38.1,171.7 270 top
R163  1k  [R0805]  123.83,173.36 0 top
R164  10k  [R0805]  143.13,191.64 0 top
R165  1k  [R0805]  143.13,194.18 180 top
R166  10k  [R0805]  143.13,196.72 180 top
R167  100k  [R0805]  35.56,171.7 270 top
R168  1k  [R0805]  77.47,164.85 270 top
R169  1k  [R0805]  38.1,166.62 90 top
R170  100k  [R0805]  35.56,166.62 90 top
RSIN  [1X01]  149.86,24.13 0 top
RSIN1  [1X01]  149.86,61.98 0 top
RSIN2  [1X01]  149.86,99.82 0 top
RSIN3  [1X01]  149.86,137.67 0 top
RSIN4  [1X01]  149.86,175.51 0 top
RSOUT  [1X01]  139.7,24.13 90 top
RSOUT1  [1X01]  139.7,61.98 90 top
RSOUT2  [1X01]  139.7,99.82 90 top
RSOUT3  [1X01]  139.7,137.67 90 top
RSOUT4  [1X01]  139.7,175.51 90 top
RX  [1X01]  137.16,21.59 90 top
RX1  [1X01]  137.16,59.44 90 top
RX2  [1X01]  137.16,97.28 90 top
RX3  [1X01]  137.16,135.13 90 top
RX4  [1X01]  137.16,172.97 90 top
SCL  [1X01]  144.78,21.59 90 top
SCL1  [1X01]  144.78,59.44 90 top
SCL2  [1X01]  144.78,97.28 90 top
SCL3  [1X01]  144.78,135.13 90 top
SCL4  [1X01]  144.78,172.97 90 top
SDA  [1X01]  147.32,24.13 90 top
SDA1  [1X01]  147.32,61.98 90 top
SDA2  [1X01]  147.32,99.82 90 top
SDA3  [1X01]  147.32,137.67 90 top
SDA4  [1X01]  147.32,175.51 90 top
TX  [1X01]  137.16,24.13 90 top
TX1  [1X01]  137.16,61.98 90 top
TX2  [1X01]  137.16,99.82 90 top
TX3  [1X01]  137.16,137.67 90 top
TX4  [1X01]  137.16,175.51 90 top

## Library data of the parts
5V 5V1-5V4 5V. 5V.1-5V.4 BT+ BT+1-BT+4 BT- BT-1-BT-4 CKOUT CKOUT1-CKOUT4 CLKIN CLKIN1-CLKIN4 G1-G20 GD1-GD20 OFFSW OFFSW1-OFFSW4 PWRCTL PWRCTL1-PWRCTL4 RSIN RSIN1-RSIN4 RSOUT RSOUT1-RSOUT4 RX RX1-RX4 SCL SCL1-SCL4 SDA SDA1-SDA4 TX TX1-TX4 = pinhead
AUXI AUXI1-AUXI4 AUXO AUXO1-AUXO4 CKI CKI1-CKI4 CKO CKO1-CKO4 CVA CVA1-CVA4 CVB CVB1-CVB4 CVC CVC1-CVC4 CVD CVD1-CVD4 GT1-GT20 = thonkiconn
C1-C110 R1-R170 = rcl
D1-D5 D9 D11 D12 D14 D15 D17 D19 D20 D22 D23 D25 D27 D28 D30 D31 D33 D35 D36 D38 D39 = jasons_stuff
D6-D8 D10 D13 D16 D18 D21 D24 D26 D29 D32 D34 D37 D40 = diode
DC DC1-DC4 IC2 IC3 IC5 IC7 IC8 IC11-IC13 IC15 IC16 IC19-IC21 IC23 IC24 IC27-IC29 IC31 IC32 IC35-IC37 IC39 IC40 L2 L4 L6 L8 L10 MIDIIN MIDIIN1-MIDIIN4 MIDIOUT MIDIOUT1-MIDIOUT4 = jason_eagle6
E$1-E$3 = adafruit
IC1 IC10 IC18 IC26 IC34 = optocoupler; MF: VISHAY/TELEFUNKEN; MPN: 6N138; OC_FARNELL: 9860150; OC_NEWARK: 35K5294
IC4 IC9 IC17 IC25 IC33 = linear
IC6 IC14 IC22 IC30 IC38 = 45xx
L1 L3 L5 L7 L9 = SparkFun
OFF OFF1-OFF4 ON ON1-ON4 = switch-omron; MPN: B3F-1000; OC_FARNELL: 176432; OC_NEWARK: 36M3542
PWR PWR1-PWR4 = led

## Nets
+5V: 5V.1 5V..1 C1.1 C4.+ C8.1 C18.1 C19.+ D3.A D4.A D6.A IC1.8 IC2.5 IC3.1 IC5.1 IC6.1 IC6.13 L1.2 R1.2 R4.2 R28.1
+5V1: 5V1.1 5V.1.1 C24.1 C30.+ C31.1 C33.+ C34.1 D10.A D11.A D14.A IC10.8 IC11.1 IC13.1 IC14.1 IC14.13 IC16.5 L3.2 R37.2 R38.2 R61.1
+5V2: 5V2.1 5V.2.1 C46.1 C52.+ C53.1 C55.+ C56.1 D18.A D19.A D22.A IC18.8 IC19.1 IC21.1 IC22.1 IC22.13 IC24.5 L5.2 R71.2 R72.2 R95.1
+5V3: 5V3.1 5V.3.1 C68.1 C74.+ C75.1 C77.+ C78.1 D26.A D27.A D30.A IC26.8 IC27.1 IC29.1 IC30.1 IC30.13 IC32.5 L7.2 R105.2 R106.2 R129.1
+5V4: 5V4.1 5V.4.1 C90.1 C96.+ C97.1 C99.+ C100.1 D34.A D35.A D38.A IC34.8 IC35.1 IC37.1 IC38.1 IC38.13 IC40.5 L9.2 R139.2 R140.2 R163.1
+9V: C14.1 C22.+ IC4.4 IC7.6 IC8.5 IC8.6 R29.1
+9V1: C23.1 C25.+ IC9.4 IC12.6 IC15.5 IC15.6 R52.1
+9V2: C45.1 C47.+ IC17.4 IC20.6 IC23.5 IC23.6 R86.1
+9V3: C67.1 C69.+ IC25.4 IC28.6 IC31.5 IC31.6 R120.1
+9V4: C89.1 C91.+ IC33.4 IC36.6 IC39.5 IC39.6 R154.1
+10V: C2.+ C9.2 D6.C IC3.5 IC6.16
+10V1: C29.+ C32.2 D10.C IC13.5 IC14.16
+10V2: C51.+ C54.2 D18.C IC21.5 IC22.16
+10V3: C73.+ C76.2 D26.C IC29.5 IC30.16
+10V4: C95.+ C98.2 D34.C IC37.5 IC38.16
AUXGATE: IC6.9 RSOUT.1
AUXGATE1: IC14.9 RSOUT1.1
AUXGATE2: IC22.9 RSOUT2.1
AUXGATE3: IC30.9 RSOUT3.1
AUXGATE4: IC38.9 RSOUT4.1
CLKOUT: CKOUT.1 IC6.3
CLKOUT1: CKOUT1.1 IC14.3
CLKOUT2: CKOUT2.1 IC22.3
CLKOUT3: CKOUT3.1 IC30.3
CLKOUT4: CKOUT4.1 IC38.3
GATE1: G3.1 IC6.14
GATE2: G2.1 IC6.5
GATE3: G1.1 IC6.7
GATE4: G4.1 IC6.11
GATE5: G5.1 IC14.14
GATE6: G6.1 IC14.5
GATE7: G7.1 IC14.7
GATE8: G8.1 IC14.11
GATE9: G9.1 IC22.14
GATE10: G10.1 IC22.5
GATE11: G11.1 IC22.7
GATE12: G12.1 IC22.11
GATE13: G13.1 IC30.14
GATE14: G14.1 IC30.5
GATE15: G15.1 IC30.7
GATE16: G16.1 IC30.11
GATE17: G17.1 IC38.14
GATE18: G18.1 IC38.5
GATE19: G19.1 IC38.7
GATE20: G20.1 IC38.11
GND: AUXI.P$3 AUXO.P$3 BT-.1 C1.2 C2.- C4.- C5.1 C6.1 C7.1 C8.2 C9.1 C10.1 C11.1 C12.1 C14.2 C18.2 C19.- C20.- C21.2 C22.- CKI.P$3 CKO.P$3 CVA.P$3 CVB.P$3 CVC.P$3 CVD.P$3 D2.C D5.C D7.A DC.PIN GD1.1 GD2.1 GD3.1 GD4.1 GT1.P$3 GT2.P$3 GT3.P$3 GT4.P$3 IC1.5 IC2.2 IC3.2 IC3.4 IC4.11 IC5.4 IC5.10 IC6.8 IC7.4 IC8.1 MIDIOUT.P$3 OFF.3 ON.3 PWR.K R5.2 R6.1 R8.1 R18.1 R20.1 R22.1 R26.1 R30.1 R32.1
GND1: AUXI1.P$3 AUXO1.P$3 BT-1.1 C23.2 C24.2 C25.- C26.2 C27.- C29.- C30.- C31.2 C32.1 C33.- C34.2 C39.1 C40.1 C41.1 C42.1 C43.1 C44.1 CKI1.P$3 CKO1.P$3 CVA1.P$3 CVB1.P$3 CVC1.P$3 CVD1.P$3 D12.C D15.C D16.A DC1.PIN GD5.1 GD6.1 GD7.1 GD8.1 GT5.P$3 GT6.P$3 GT7.P$3 GT8.P$3 IC9.11 IC10.5 IC11.4 IC11.10 IC12.4 IC13.2 IC13.4 IC14.8 IC15.1 IC16.2 MIDIOUT1.P$3 OFF1.3 ON1.3 PWR1.K R36.2 R48.1 R49.1 R50.1 R51.1 R53.1 R64.1 R65.1 R68.1
GND2: AUXI2.P$3 AUXO2.P$3 BT-2.1 C45.2 C46.2 C47.- C48.2 C49.- C51.- C52.- C53.2 C54.1 C55.- C56.2 C61.1 C62.1 C63.1 C64.1 C65.1 C66.1 CKI2.P$3 CKO2.P$3 CVA2.P$3 CVB2.P$3 CVC2.P$3 CVD2.P$3 D20.C D23.C D24.A DC2.PIN GD9.1 GD10.1 GD11.1 GD12.1 GT9.P$3 GT10.P$3 GT11.P$3 GT12.P$3 IC17.11 IC18.5 IC19.4 IC19.10 IC20.4 IC21.2 IC21.4 IC22.8 IC23.1 IC24.2 MIDIOUT2.P$3 OFF2.3 ON2.3 PWR2.K R70.2 R82.1 R83.1 R84.1 R85.1 R87.1 R98.1 R99.1 R102.1
GND3: AUXI3.P$3 AUXO3.P$3 BT-3.1 C67.2 C68.2 C69.- C70.2 C71.- C73.- C74.- C75.2 C76.1 C77.- C78.2 C83.1 C84.1 C85.1 C86.1 C87.1 C88.1 CKI3.P$3 CKO3.P$3 CVA3.P$3 CVB3.P$3 CVC3.P$3 CVD3.P$3 D28.C D31.C D32.A DC3.PIN GD13.1 GD14.1 GD15.1 GD16.1 GT13.P$3 GT14.P$3 GT15.P$3 GT16.P$3 IC25.11 IC26.5 IC27.4 IC27.10 IC28.4 IC29.2 IC29.4 IC30.8 IC31.1 IC32.2 MIDIOUT3.P$3 OFF3.3 ON3.3 PWR3.K R104.2 R116.1 R117.1 R118.1 R119.1 R121.1 R132.1 R133.1 R136.1
GND4: AUXI4.P$3 AUXO4.P$3 BT-4.1 C89.2 C90.2 C91.- C92.2 C93.- C95.- C96.- C97.2 C98.1 C99.- C100.2 C105.1 C106.1 C107.1 C108.1 C109.1 C110.1 CKI4.P$3 CKO4.P$3 CVA4.P$3 CVB4.P$3 CVC4.P$3 CVD4.P$3 D36.C D39.C D40.A DC4.PIN GD17.1 GD18.1 GD19.1 GD20.1 GT17.P$3 GT18.P$3 GT19.P$3 GT20.P$3 IC33.11 IC34.5 IC35.4 IC35.10 IC36.4 IC37.2 IC37.4 IC38.8 IC39.1 IC40.2 MIDIOUT4.P$3 OFF4.3 ON4.3 PWR4.K R138.2 R150.1 R151.1 R152.1 R153.1 R155.1 R166.1 R167.1 R170.1
MIDI_IN: IC1.6 R4.1 RX.1
MIDI_IN1: IC10.6 R37.1 RX1.1
MIDI_IN2: IC18.6 R71.1 RX2.1
MIDI_IN3: IC26.6 R105.1 RX3.1
MIDI_IN4: IC34.6 R139.1 RX4.1
MIDI_OUT: R2.2 TX.1
MIDI_OUT1: R39.2 TX1.1
MIDI_OUT2: R73.2 TX2.1
MIDI_OUT3: R107.2 TX3.1
MIDI_OUT4: R141.2 TX4.1
N$1: MIDIOUT.P$2 R1.1
N$2: D1.A IC1.2 R3.2
N$3: IC4.3 IC5.7
N$4: D1.C IC1.3 MIDIIN.P$1
N$5: IC1.7 R5.1
N$6: MIDIOUT.P$1 R2.1
N$7: MIDIIN.P$2 R3.1
N$8: CVC.P$1 R16.2 R17.2
N$9: CVD.P$1 R25.2 R27.2
N$10: CVB.P$1 R19.2 R21.2
N$11: CVA.P$1 R23.2 R24.2
N$12: C13.2 IC4.1 R16.1
N$13: C15.2 IC4.7 R27.1
N$14: C17.2 IC4.8 R24.1
N$15: C16.2 IC4.14 R19.1
N$16: BT+.1 DC.NC
N$17: C16.1 IC4.13 R20.2 R21.1
N$18: C17.1 IC4.9 R22.2 R23.1
N$19: IC6.10 R15.1
N$20: C15.1 IC4.6 R25.1 R26.2
N$21: D9.A IC10.2 R35.2
N$22: C13.1 IC4.2 R17.1 R18.2
N$23: CLKIN.1 IC2.6
N$24: AUXI.P$1 R8.2 R9.2
N$25: IC2.4 RSIN.1
N$26: D4.C D5.A IC2.3 R9.1
N$27: C12.2 GT2.P$1 R15.2
N$28: D9.C IC10.3 MIDIIN1.P$1
N$29: IC4.5 IC5.6
N$30: IC4.10 IC5.9
N$31: IC4.12 IC5.8
N$32: IC7.1 IC7.7 IC7.8 R29.2
N$33: IC7.5 R30.2 R31.2
N$34: C21.1 IC7.3
N$35: D7.C IC7.2 L2.2
N$36: D8.A DC.BARREL
N$37: IC6.2 R10.1
N$38: C3.+ IC3.6
N$39: C3.- IC3.3
N$40: IC6.4 R11.1
N$41: IC6.6 R12.1
N$42: IC10.7 R36.1
N$43: IC6.12 R14.1
N$44: AUXO.P$1 C5.2 R10.2
N$45: C6.2 CKO.P$1 R11.2
N$46: C7.2 GT1.P$1 R12.2
N$47: C11.2 GT4.P$1 R14.2
N$48: C10.2 GT3.P$1 R13.2
N$49: IC6.15 R13.1
N$50: MIDIOUT1.P$1 R39.1
N$51: C20.+ L1.1 L2.1 R31.1
N$52: CVC1.P$1 R40.2 R44.2
N$53: D2.A D3.C IC2.1 R7.1
N$54: CKI.P$1 R6.2 R7.2
N$55: CVD1.P$1 R41.2 R45.2
N$56: PWR.A R28.2
N$57: C35.2 IC9.1 R40.1
N$58: C36.2 IC9.7 R41.1
N$59: C37.2 IC9.8 R42.1
N$60: C38.2 IC9.14 R43.1
N$61: IC8.4 IC8.7 IC8.8 ON.2 R34.2
N$62: IC8.2 R32.2 R33.2
N$63: C38.1 IC9.13 R47.1 R51.2
N$64: C37.1 IC9.9 R46.1 R50.2
N$65: C36.1 IC9.6 R45.1 R49.2
N$66: C35.1 IC9.2 R44.1 R48.2
N$67: IC9.10 IC11.9
N$68: IC9.12 IC11.8
N$69: IC12.1 IC12.7 IC12.8 R52.2
N$70: C26.1 IC12.3
N$71: D16.C IC12.2 L4.2
N$72: IC12.5 R53.2 R54.2
N$73: C28.+ IC13.6
N$74: C28.- IC13.3
N$75: D13.A DC1.BARREL
N$76: CVB1.P$1 R43.2 R47.2
N$77: CVA1.P$1 R42.2 R46.2
N$78: IC14.2 R55.1
N$79: IC14.4 R56.1
N$80: IC14.6 R57.1
N$81: IC14.12 R58.1
N$82: AUXO1.P$1 C39.2 R55.2
N$83: C40.2 CKO1.P$1 R56.2
N$84: C41.2 GT6.P$1 R57.2
N$85: C42.2 GT7.P$1 R58.2
N$86: C43.2 GT8.P$1 R59.2
N$87: IC14.15 R59.1
N$88: D11.C D12.A IC16.1 R60.1
N$89: CKI1.P$1 R60.2 R65.2
N$90: PWR1.A R61.2
N$91: IC15.4 IC15.7 IC15.8 ON1.2 R62.2
N$92: IC15.2 R63.2 R64.2
N$93: IC9.3 IC11.7
N$94: IC9.5 IC11.6
N$95: C27.+ L3.1 L4.1 R54.1
N$96: MIDIIN1.P$2 R35.1
N$97: MIDIOUT1.P$2 R38.1
N$98: BT+1.1 DC1.NC
N$99: IC14.10 R66.1
N$100: AUXI1.P$1 R67.2 R68.2
N$101: D14.C D15.A IC16.3 R67.1
N$102: IC16.4 RSIN1.1
N$103: CLKIN1.1 IC16.6
N$104: C44.2 GT5.P$1 R66.2
N$105: D17.A IC18.2 R69.2
N$106: D17.C IC18.3 MIDIIN2.P$1
N$107: IC18.7 R70.1
N$108: MIDIOUT2.P$1 R73.1
N$109: CVC2.P$1 R74.2 R78.2
N$110: CVD2.P$1 R75.2 R79.2
N$111: C57.2 IC17.1 R74.1
N$112: C58.2 IC17.7 R75.1
N$113: C59.2 IC17.8 R76.1
N$114: C60.2 IC17.14 R77.1
N$115: C60.1 IC17.13 R81.1 R85.2
N$116: C59.1 IC17.9 R80.1 R84.2
N$117: C58.1 IC17.6 R79.1 R83.2
N$118: C57.1 IC17.2 R78.1 R82.2
N$119: IC17.10 IC19.9
N$120: IC17.12 IC19.8
N$121: IC20.1 IC20.7 IC20.8 R86.2
N$122: C48.1 IC20.3
N$123: D24.C IC20.2 L6.2
N$124: IC20.5 R87.2 R88.2
N$125: C50.+ IC21.6
N$126: C50.- IC21.3
N$127: D21.A DC2.BARREL
N$128: CVB2.P$1 R77.2 R81.2
N$129: CVA2.P$1 R76.2 R80.2
N$130: IC22.2 R89.1
N$131: IC22.4 R90.1
N$132: IC22.6 R91.1
N$133: IC22.12 R92.1
N$134: AUXO2.P$1 C61.2 R89.2
N$135: C62.2 CKO2.P$1 R90.2
N$136: C63.2 GT10.P$1 R91.2
N$137: C64.2 GT11.P$1 R92.2
N$138: C65.2 GT12.P$1 R93.2
N$139: IC22.15 R93.1
N$140: D19.C D20.A IC24.1 R94.1
N$141: CKI2.P$1 R94.2 R99.2
N$142: PWR2.A R95.2
N$143: IC23.4 IC23.7 IC23.8 ON2.2 R96.2
N$144: IC23.2 R97.2 R98.2
N$145: IC17.3 IC19.7
N$146: IC17.5 IC19.6
N$147: C49.+ L5.1 L6.1 R88.1
N$148: MIDIIN2.P$2 R69.1
N$149: MIDIOUT2.P$2 R72.1
N$150: BT+2.1 DC2.NC
N$151: IC22.10 R100.1
N$152: AUXI2.P$1 R101.2 R102.2
N$153: D22.C D23.A IC24.3 R101.1
N$154: IC24.4 RSIN2.1
N$155: CLKIN2.1 IC24.6
N$156: C66.2 GT9.P$1 R100.2
N$157: D25.A IC26.2 R103.2
N$158: D25.C IC26.3 MIDIIN3.P$1
N$159: IC26.7 R104.1
N$160: MIDIOUT3.P$1 R107.1
N$161: CVC3.P$1 R108.2 R112.2
N$162: CVD3.P$1 R109.2 R113.2
N$163: C79.2 IC25.1 R108.1
N$164: C80.2 IC25.7 R109.1
N$165: C81.2 IC25.8 R110.1
N$166: C82.2 IC25.14 R111.1
N$167: C82.1 IC25.13 R115.1 R119.2
N$168: C81.1 IC25.9 R114.1 R118.2
N$169: C80.1 IC25.6 R113.1 R117.2
N$170: C79.1 IC25.2 R112.1 R116.2
N$171: IC25.10 IC27.9
N$172: IC25.12 IC27.8
N$173: IC28.1 IC28.7 IC28.8 R120.2
N$174: C70.1 IC28.3
N$175: D32.C IC28.2 L8.2
N$176: IC28.5 R121.2 R122.2
N$177: C72.+ IC29.6
N$178: C72.- IC29.3
N$179: D29.A DC3.BARREL
N$180: CVB3.P$1 R111.2 R115.2
N$181: CVA3.P$1 R110.2 R114.2
N$182: IC30.2 R123.1
N$183: IC30.4 R124.1
N$184: IC30.6 R125.1
N$185: IC30.12 R126.1
N$186: AUXO3.P$1 C83.2 R123.2
N$187: C84.2 CKO3.P$1 R124.2
N$188: C85.2 GT14.P$1 R125.2
N$189: C86.2 GT15.P$1 R126.2
N$190: C87.2 GT16.P$1 R127.2
N$191: IC30.15 R127.1
N$192: D27.C D28.A IC32.1 R128.1
N$193: CKI3.P$1 R128.2 R133.2
N$194: PWR3.A R129.2
N$195: IC31.4 IC31.7 IC31.8 ON3.2 R130.2
N$196: IC31.2 R131.2 R132.2
N$197: IC25.3 IC27.7
N$198: IC25.5 IC27.6
N$199: C71.+ L7.1 L8.1 R122.1
N$200: MIDIIN3.P$2 R103.1
N$201: MIDIOUT3.P$2 R106.1
N$202: BT+3.1 DC3.NC
N$203: IC30.10 R134.1
N$204: AUXI3.P$1 R135.2 R136.2
N$205: D30.C D31.A IC32.3 R135.1
N$206: IC32.4 RSIN3.1
N$207: CLKIN3.1 IC32.6
N$208: C88.2 GT13.P$1 R134.2
N$209: D33.A IC34.2 R137.2
N$210: D33.C IC34.3 MIDIIN4.P$1
N$211: IC34.7 R138.1
N$212: MIDIOUT4.P$1 R141.1
N$213: CVC4.P$1 R142.2 R146.2
N$214: CVD4.P$1 R143.2 R147.2
N$215: C101.2 IC33.1 R142.1
N$216: C102.2 IC33.7 R143.1
N$217: C103.2 IC33.8 R144.1
N$218: C104.2 IC33.14 R145.1
N$219: C104.1 IC33.13 R149.1 R153.2
N$220: C103.1 IC33.9 R148.1 R152.2
N$221: C102.1 IC33.6 R147.1 R151.2
N$222: C101.1 IC33.2 R146.1 R150.2
N$223: IC33.10 IC35.9
N$224: IC33.12 IC35.8
N$225: IC36.1 IC36.7 IC36.8 R154.2
N$226: C92.1 IC36.3
N$227: D40.C IC36.2 L10.2
N$228: IC36.5 R155.2 R156.2
N$229: C94.+ IC37.6
N$230: C94.- IC37.3
N$231: D37.A DC4.BARREL
N$232: CVB4.P$1 R145.2 R149.2
N$233: CVA4.P$1 R144.2 R148.2
N$234: IC38.2 R157.1
N$235: IC38.4 R158.1
N$236: IC38.6 R159.1
N$237: IC38.12 R160.1
N$238: AUXO4.P$1 C105.2 R157.2
N$239: C106.2 CKO4.P$1 R158.2
N$240: C107.2 GT18.P$1 R159.2
N$241: C108.2 GT19.P$1 R160.2
N$242: C109.2 GT20.P$1 R161.2
N$243: IC38.15 R161.1
N$244: D35.C D36.A IC40.1 R162.1
N$245: CKI4.P$1 R162.2 R167.2
N$246: PWR4.A R163.2
N$247: IC39.4 IC39.7 IC39.8 ON4.2 R164.2
N$248: IC39.2 R165.2 R166.2
N$249: IC33.3 IC35.7
N$250: IC33.5 IC35.6
N$251: C93.+ L9.1 L10.1 R156.1
N$252: MIDIIN4.P$2 R137.1
N$253: MIDIOUT4.P$2 R140.1
N$254: BT+4.1 DC4.NC
N$255: IC38.10 R168.1
N$256: AUXI4.P$1 R169.2 R170.2
N$257: D38.C D39.A IC40.3 R169.1
N$258: IC40.4 RSIN4.1
N$259: CLKIN4.1 IC40.6
N$260: C110.2 GT17.P$1 R168.2
OFF_SW: OFF.2 OFFSW.1
OFF_SW1: OFF1.2 OFFSW1.1
OFF_SW2: OFF2.2 OFFSW2.1
OFF_SW3: OFF3.2 OFFSW3.1
OFF_SW4: OFF4.2 OFFSW4.1
PWR_CTRL: PWRCTL.1 R33.1
PWR_CTRL1: PWRCTL1.1 R63.1
PWR_CTRL2: PWRCTL2.1 R97.1
PWR_CTRL3: PWRCTL3.1 R131.1
PWR_CTRL4: PWRCTL4.1 R165.1
SCL: IC5.2 SCL.1
SCL1: IC11.2 SCL1.1
SCL2: IC19.2 SCL2.1
SCL3: IC27.2 SCL3.1
SCL4: IC35.2 SCL4.1
SDA: IC5.3 SDA.1
SDA1: IC11.3 SDA1.1
SDA2: IC19.3 SDA2.1
SDA3: IC27.3 SDA3.1
SDA4: IC35.3 SDA4.1
VIN: D8.C IC8.3 R34.1
VIN1: D13.C IC15.3 R62.1
VIN2: D21.C IC23.3 R96.1
VIN3: D29.C IC31.3 R130.1
VIN4: D37.C IC39.3 R164.1

## Tracks (layer width: path | path; a pad name or v marks a point on that pad's centre or on a via)
+5V  (via drill 0.6)
  Top 0.254: D4.A 40.52,16.5 39.24,17.78 34.16,17.78 33.66,18.29 33.66,22.73 33.78,22.86 | 33.78,22.86 33.02,22.86 31.75,21.59 | 33.78,22.86 42.93,22.86 43.18,22.61 D3.A | 47.88,14.73 47.88,14.03 C1.1 47.88,13.91 | 31.75,21.59 IC1.8 | R4.2 31.75,21.59 | R28.1 122.88,20.01 122.81,19.94 | R1.2 12.7,16.51 17.78,11.43 24.13,11.43 25.4,12.7
  Top 0.305: IC5.1 65.9,33.26 63.81,31.18 C18.1
  Top 0.406: D6.A 59.31,21.59 59.94,20.95 v59.94,15.62 59.08,15.62 C4.+ 58.44,16.26 | 71.12,18.41 71.12,21.46 70.36,22.23 IC6.1 67.76,22.26 C8.1 67.76,27.49 64.01,31.24 63.57,31.24 C18.1 63.82,31.5 | IC3.1 55.06,16.83 54.61,16.38 v54.61,15.62 | C1.1 v49.78,13.97 49.78,12.45 49.15,11.81 26.29,11.81 25.4,12.7 25.4,20.32 26.67,21.59 IC1.8 | IC2.5 46.99,15.62 47.88,14.73 | 31.43,21.59 R4.2 | 5V.1 5V..1 134.62,20.57 133.99,19.94 122.81,19.94 97.16,19.94 95.82,18.61 L1.2 95.77,17.27 92.33,17.27 v91.19,18.41 91.19,21.58 C19.+ | v69.85,18.41 71.12,18.41 | 71.12,18.41 IC6.13 v75.56,18.41
  Bottom 0.406: v49.78,13.97 51.44,15.62 v54.61,15.62 v59.94,15.62 65.15,15.62 67.94,18.41 v69.85,18.41 | v75.56,18.41 v91.19,18.41
+5V1  (via drill 0.6)
  Top 0.254: D14.A 40.52,54.35 39.24,55.63 34.16,55.63 33.66,56.13 33.66,60.58 33.78,60.71 | 33.78,60.71 33.02,60.71 31.75,59.44 | 33.78,60.71 42.93,60.71 43.18,60.45 D11.A | 47.88,52.58 47.88,51.88 C34.1 47.88,51.76 | 31.75,59.44 IC10.8 | R37.2 31.75,59.44 | R61.1 122.88,57.85 122.81,57.79 | R38.2 12.7,54.36 17.78,49.28 24.13,49.28 25.4,50.55
  Top 0.305: IC11.1 65.9,71.1 63.81,69.02 C24.1
  Top 0.406: D10.A 59.31,59.44 59.94,58.8 v59.94,53.47 59.08,53.47 C30.+ 58.44,54.1 | 71.12,56.26 71.12,59.31 70.36,60.07 IC14.1 67.76,60.11 C31.1 67.76,65.34 64.01,69.09 63.57,69.09 C24.1 63.82,69.34 | IC13.1 55.06,54.68 54.61,54.23 v54.61,53.47 | C34.1 v49.78,51.82 49.78,50.29 49.15,49.66 26.29,49.66 25.4,50.55 25.4,58.17 26.67,59.44 IC10.8 | IC16.5 46.99,53.47 47.88,52.58 | 31.43,59.44 R37.2 | 5V1.1 5V.1.1 134.62,58.42 133.99,57.79 122.81,57.79 97.16,57.79 95.82,56.45 L3.2 95.77,55.12 92.33,55.12 v91.19,56.26 91.19,59.42 C33.+ | v69.85,56.26 71.12,56.26 | 71.12,56.26 IC14.13 v75.56,56.26
  Bottom 0.406: v49.78,51.82 51.44,53.47 v54.61,53.47 v59.94,53.47 65.15,53.47 67.94,56.26 v69.85,56.26 | v75.56,56.26 v91.19,56.26
+5V2  (via drill 0.6)
  Top 0.254: D22.A 40.52,92.19 39.24,93.47 34.16,93.47 33.66,93.98 33.66,98.42 33.78,98.55 | 33.78,98.55 33.02,98.55 31.75,97.28 | 33.78,98.55 42.93,98.55 43.18,98.3 D19.A | 47.88,90.42 47.88,89.72 C56.1 47.88,89.6 | 31.75,97.28 IC18.8 | R71.2 31.75,97.28 | R95.1 122.88,95.7 122.81,95.63 | R72.2 12.7,92.2 17.78,87.12 24.13,87.12 25.4,88.39
  Top 0.305: IC19.1 65.9,108.95 63.81,106.87 C46.1
  Top 0.406: D18.A 59.31,97.28 59.94,96.65 v59.94,91.31 59.08,91.31 C52.+ 58.44,91.95 | 71.12,94.11 71.12,97.16 70.36,97.92 IC22.1 67.76,97.95 C53.1 67.76,103.19 64.01,106.93 63.57,106.93 C46.1 63.82,107.19 | IC21.1 55.06,92.52 54.61,92.08 v54.61,91.31 | C56.1 v49.78,89.66 49.78,88.14 49.15,87.5 26.29,87.5 25.4,88.39 25.4,96.01 26.67,97.28 IC18.8 | IC24.5 46.99,91.31 47.88,90.42 | 31.43,97.28 R71.2 | 5V2.1 5V.2.1 134.62,96.27 133.99,95.63 122.81,95.63 97.16,95.63 95.82,94.3 L5.2 95.77,92.96 92.33,92.96 v91.19,94.11 91.19,97.27 C55.+ | v69.85,94.11 71.12,94.11 | 71.12,94.11 IC22.13 v75.56,94.11
  Bottom 0.406: v49.78,89.66 51.44,91.31 v54.61,91.31 v59.94,91.31 65.15,91.31 67.94,94.11 v69.85,94.11 | v75.56,94.11 v91.19,94.11
+5V3  (via drill 0.6)
  Top 0.254: D30.A 40.52,130.04 39.24,131.32 34.16,131.32 33.66,131.83 33.66,136.27 33.78,136.4 | 33.78,136.4 33.02,136.4 31.75,135.13 | 33.78,136.4 42.93,136.4 43.18,136.14 D27.A | 47.88,128.27 47.88,127.57 C78.1 47.88,127.45 | 31.75,135.13 IC26.8 | R105.2 31.75,135.13 | R129.1 122.88,133.54 122.81,133.48 | R106.2 12.7,130.05 17.78,124.97 24.13,124.97 25.4,126.24
  Top 0.305: IC27.1 65.9,146.8 63.81,144.71 C68.1
  Top 0.406: D26.A 59.31,135.13 59.94,134.49 v59.94,129.16 59.08,129.16 C74.+ 58.44,129.79 | 71.12,131.95 71.12,135 70.36,135.76 IC30.1 67.76,135.8 C75.1 67.76,141.03 64.01,144.78 63.57,144.78 C68.1 63.82,145.03 | IC29.1 55.06,130.37 54.61,129.92 v54.61,129.16 | C78.1 v49.78,127.51 49.78,125.98 49.15,125.35 26.29,125.35 25.4,126.24 25.4,133.86 26.67,135.13 IC26.8 | IC32.5 46.99,129.16 47.88,128.27 | 31.43,135.13 R105.2 | 5V3.1 5V.3.1 134.62,134.11 133.99,133.48 122.81,133.48 97.16,133.48 95.82,132.14 L7.2 95.77,130.81 92.33,130.81 v91.19,131.95 91.19,135.12 C77.+ | v69.85,131.95 71.12,131.95 | 71.12,131.95 IC30.13 v75.56,131.95
  Bottom 0.406: v49.78,127.51 51.44,129.16 v54.61,129.16 v59.94,129.16 65.15,129.16 67.94,131.95 v69.85,131.95 | v75.56,131.95 v91.19,131.95
+5V4  (via drill 0.6)
  Top 0.254: D38.A 40.52,167.89 39.24,169.16 34.16,169.16 33.66,169.67 33.66,174.12 33.78,174.24 | 33.78,174.24 33.02,174.24 31.75,172.97 | 33.78,174.24 42.93,174.24 43.18,173.99 D35.A | 47.88,166.12 47.88,165.42 C100.1 47.88,165.29 | 31.75,172.97 IC34.8 | R139.2 31.75,172.97 | R163.1 122.88,171.39 122.81,171.32 | R140.2 12.7,167.89 17.78,162.81 24.13,162.81 25.4,164.08
  Top 0.305: IC35.1 65.9,184.64 63.81,182.56 C90.1
  Top 0.406: D34.A 59.31,172.97 59.94,172.34 v59.94,167 59.08,167 C96.+ 58.44,167.64 | 71.12,169.8 71.12,172.85 70.36,173.61 IC38.1 67.76,173.64 C97.1 67.76,178.88 64.01,182.63 63.57,182.63 C90.1 63.82,182.88 | IC37.1 55.06,168.21 54.61,167.77 v54.61,167 | C100.1 v49.78,165.35 49.78,163.83 49.15,163.19 26.29,163.19 25.4,164.08 25.4,171.7 26.67,172.97 IC34.8 | IC40.5 46.99,167 47.88,166.12 | 31.43,172.97 R139.2 | 5V4.1 5V.4.1 134.62,171.96 133.99,171.32 122.81,171.32 97.16,171.32 95.82,169.99 L9.2 95.77,168.66 92.33,168.66 v91.19,169.8 91.19,172.96 C99.+ | v69.85,169.8 71.12,169.8 | 71.12,169.8 IC38.13 v75.56,169.8
  Bottom 0.406: v49.78,165.35 51.44,167 v54.61,167 v59.94,167 65.15,167 67.94,169.8 v69.85,169.8 | v75.56,169.8 v91.19,169.8
+9V  (via drill 0.6)
  Top 0.406: IC7.6 125.28,16.13 R29.1 125.48,16.26 125.6,16.13 126.62,16.13 127.64,17.15 v127.64,18.16 | IC8.6 IC8.5 v147.45,34.42 | v160.02,22.86 160.02,21.59 161.29,20.32 C22.+
  Top 0.61: C14.1 v64.9,38.61 IC4.4
  Bottom 0.406: v64.9,38.61 83.31,38.61 86.23,35.69 132.08,35.69 | 132.08,35.69 135.89,35.69 137.16,34.42 v147.45,34.42 148.46,34.42 149.35,33.53 158.62,33.53 160.02,32.13 v160.02,22.86 | v127.64,18.16 127.64,26.04 132.08,30.48 132.08,35.69
+9V1  (via drill 0.6)
  Top 0.406: IC12.6 125.28,53.98 R52.1 125.48,54.1 125.6,53.98 126.62,53.98 127.64,54.99 v127.64,56.01 | IC15.6 IC15.5 v147.45,72.26 | v160.02,60.71 160.02,59.44 161.29,58.17 C25.+
  Top 0.61: C23.1 v64.9,76.45 IC9.4
  Bottom 0.406: v64.9,76.45 83.31,76.45 86.23,73.53 132.08,73.53 | 132.08,73.53 135.89,73.53 137.16,72.26 v147.45,72.26 148.46,72.26 149.35,71.37 158.62,71.37 160.02,69.98 v160.02,60.71 | v127.64,56.01 127.64,63.88 132.08,68.33 132.08,73.53
+9V2  (via drill 0.6)
  Top 0.406: IC20.6 125.28,91.82 R86.1 125.48,91.95 125.6,91.82 126.62,91.82 127.64,92.84 v127.64,93.85 | IC23.6 IC23.5 v147.45,110.11 | v160.02,98.55 160.02,97.28 161.29,96.01 C47.+
  Top 0.61: C45.1 v64.9,114.3 IC17.4
  Bottom 0.406: v64.9,114.3 83.31,114.3 86.23,111.38 132.08,111.38 | 132.08,111.38 135.89,111.38 137.16,110.11 v147.45,110.11 148.46,110.11 149.35,109.22 158.62,109.22 160.02,107.82 v160.02,98.55 | v127.64,93.85 127.64,101.73 132.08,106.17 132.08,111.38
+9V3  (via drill 0.6)
  Top 0.406: IC28.6 125.28,129.67 R120.1 125.48,129.79 125.6,129.67 126.62,129.67 127.64,130.68 v127.64,131.7 | IC31.6 IC31.5 v147.45,147.95 | v160.02,136.4 160.02,135.13 161.29,133.86 C69.+
  Top 0.61: C67.1 v64.9,152.15 IC25.4
  Bottom 0.406: v64.9,152.15 83.31,152.15 86.23,149.23 132.08,149.23 | 132.08,149.23 135.89,149.23 137.16,147.95 v147.45,147.95 148.46,147.95 149.35,147.07 158.62,147.07 160.02,145.67 v160.02,136.4 | v127.64,131.7 127.64,139.57 132.08,144.02 132.08,149.23
+9V4  (via drill 0.6)
  Top 0.406: IC36.6 125.28,167.51 R154.1 125.48,167.64 125.6,167.51 126.62,167.51 127.64,168.53 v127.64,169.55 | IC39.6 IC39.5 v147.45,185.8 | v160.02,174.24 160.02,172.97 161.29,171.7 C91.+
  Top 0.61: C89.1 v64.9,189.99 IC33.4
  Bottom 0.406: v64.9,189.99 83.31,189.99 86.23,187.07 132.08,187.07 | 132.08,187.07 135.89,187.07 137.16,185.8 v147.45,185.8 148.46,185.8 149.35,184.91 158.62,184.91 160.02,183.51 v160.02,174.24 | v127.64,169.55 127.64,177.42 132.08,181.86 132.08,187.07
+10V  (via drill 0.6)
  Top 0.406: 50.7,16.38 C2.+ 50.82,16.26 51.94,16.26 52.32,16.64 52.32,17.78 | C9.2 74.1,22.39 IC6.16 v72.14,22.23 | 52.32,17.78 52.32,21.59 D6.C v50.8,21.59 | IC3.5 52.32,17.78
  Bottom 0.406: v72.14,22.23 71.75,22.23 71.12,21.59 v50.8,21.59
+10V1  (via drill 0.6)